# Altium PCB WOLFMAN.PcbDoc (part 1 of 2)
Units mil, origin at the board's own origin, x right, y up, seen from the top; angles counter-clockwise.
Board outline 1610.24 x 1562.99 mil, 4 copper layers (Top Layer, Signal Layer 1, Signal Layer 2, Bottom Layer), stack 30.635 mil thick; 161 components, 149 nets, 706 pads, 227 vias.
Unrouted connection lines stored in the file: 40.
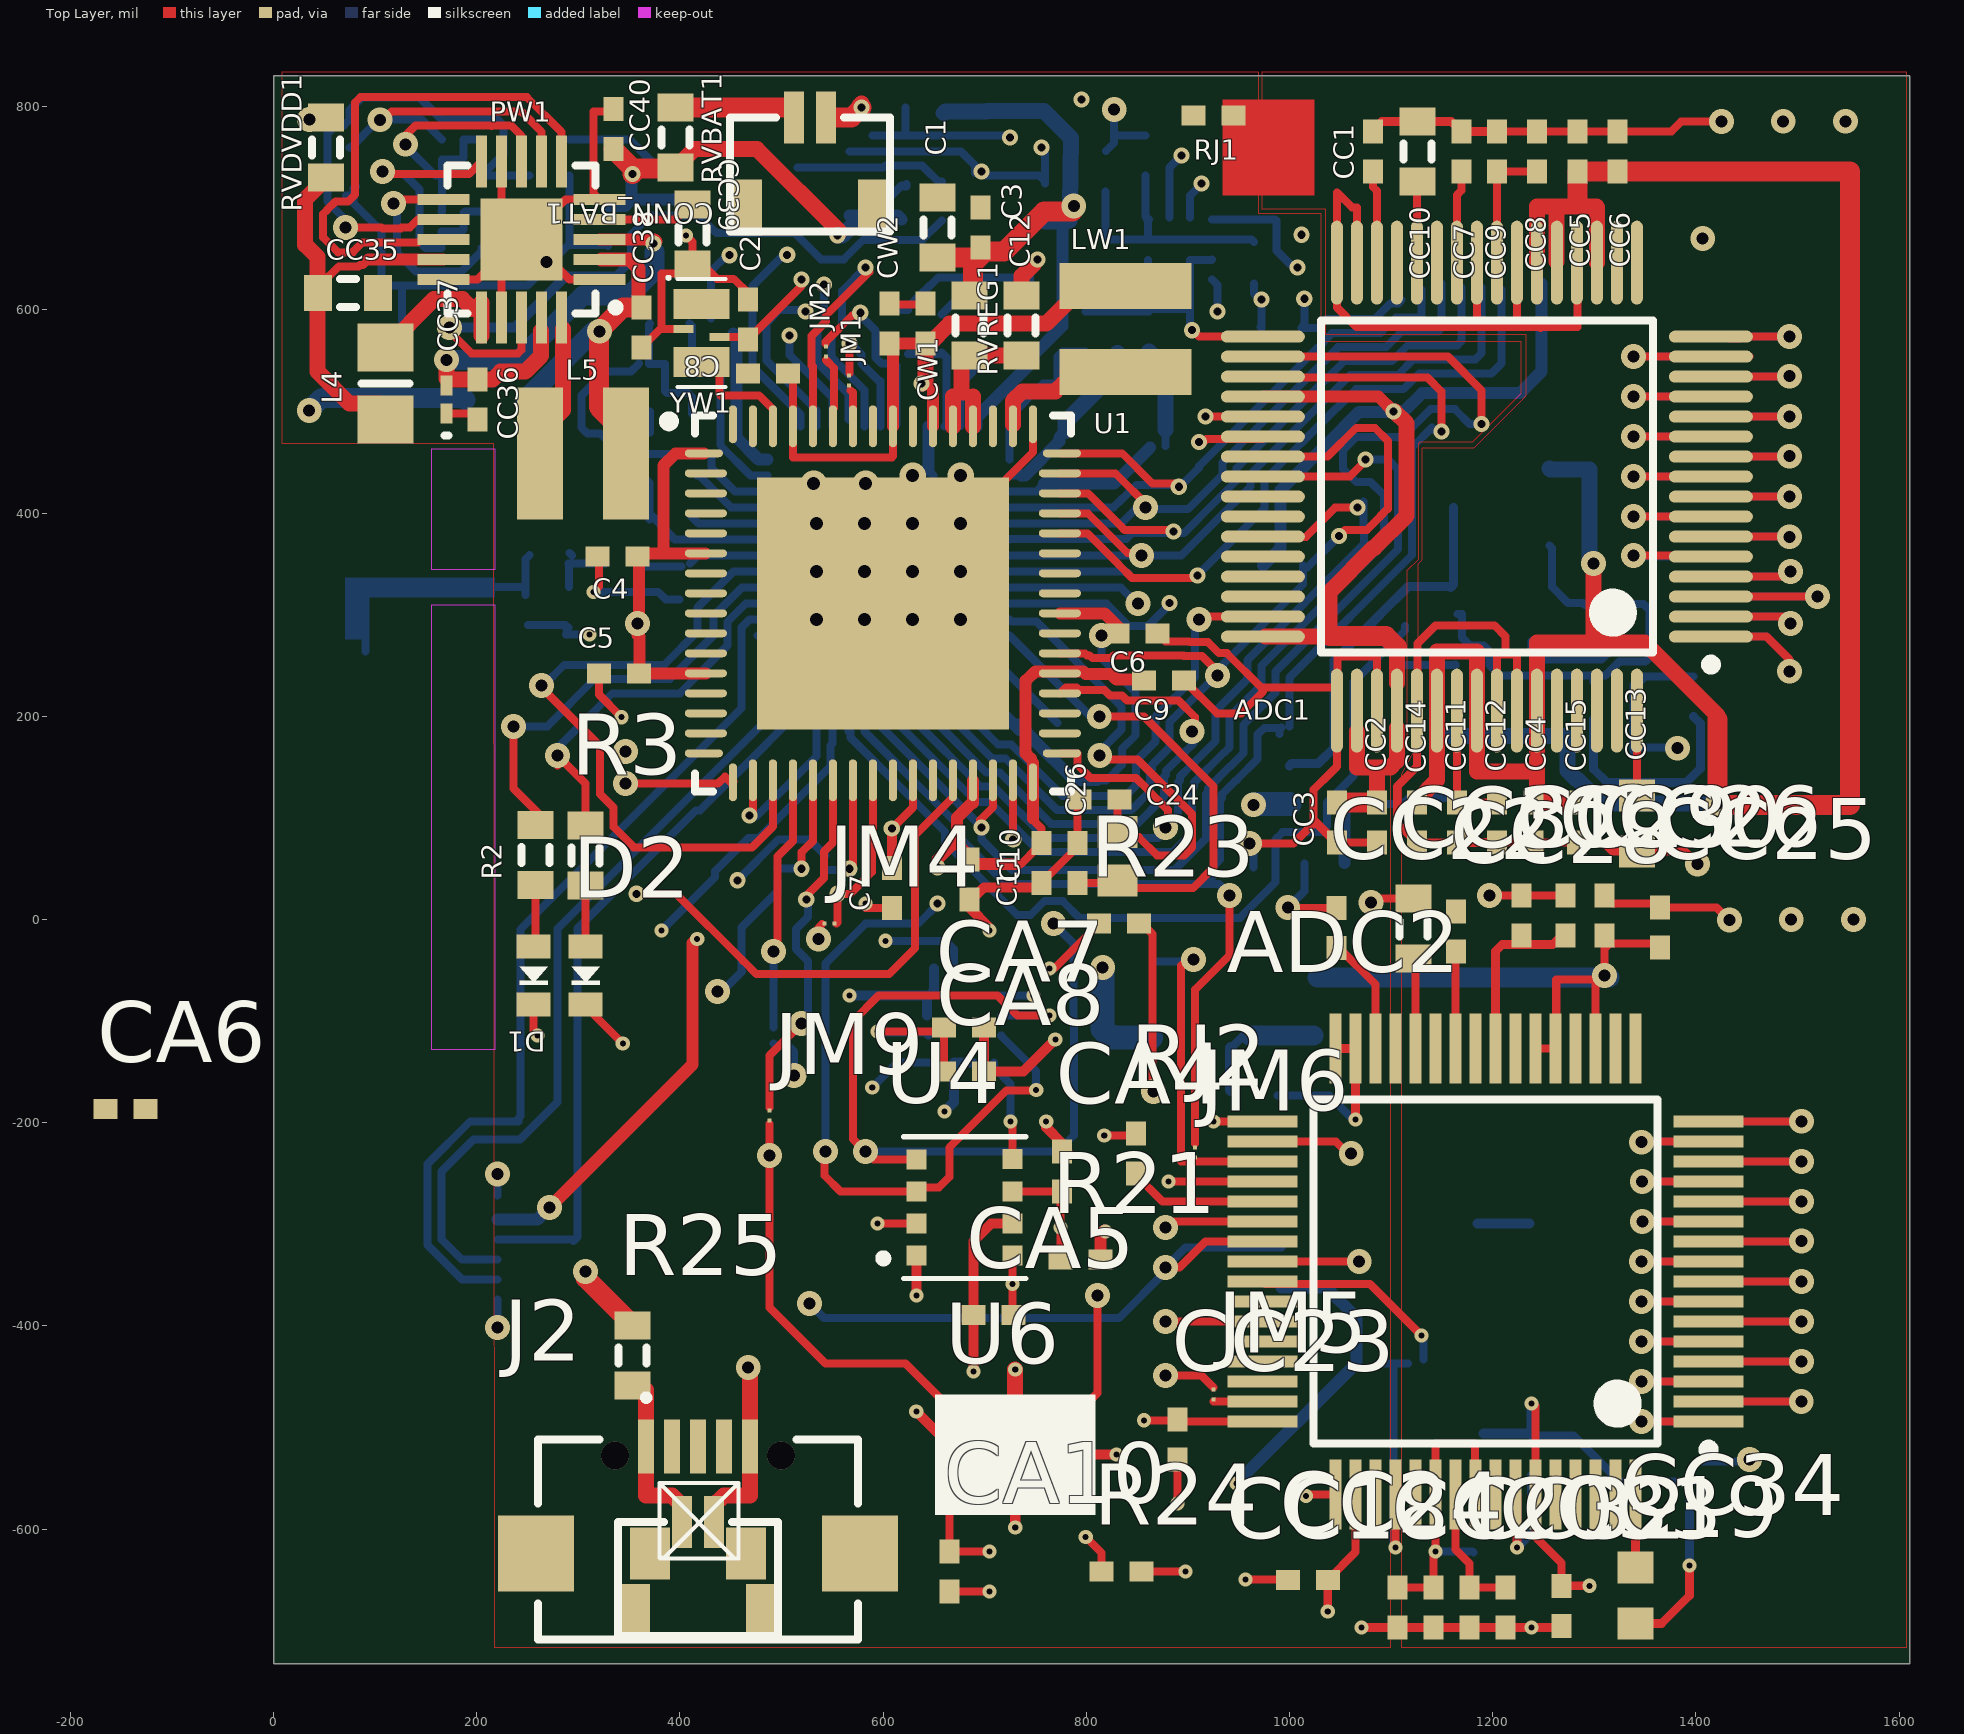
[diagram p0: Top Layer view]
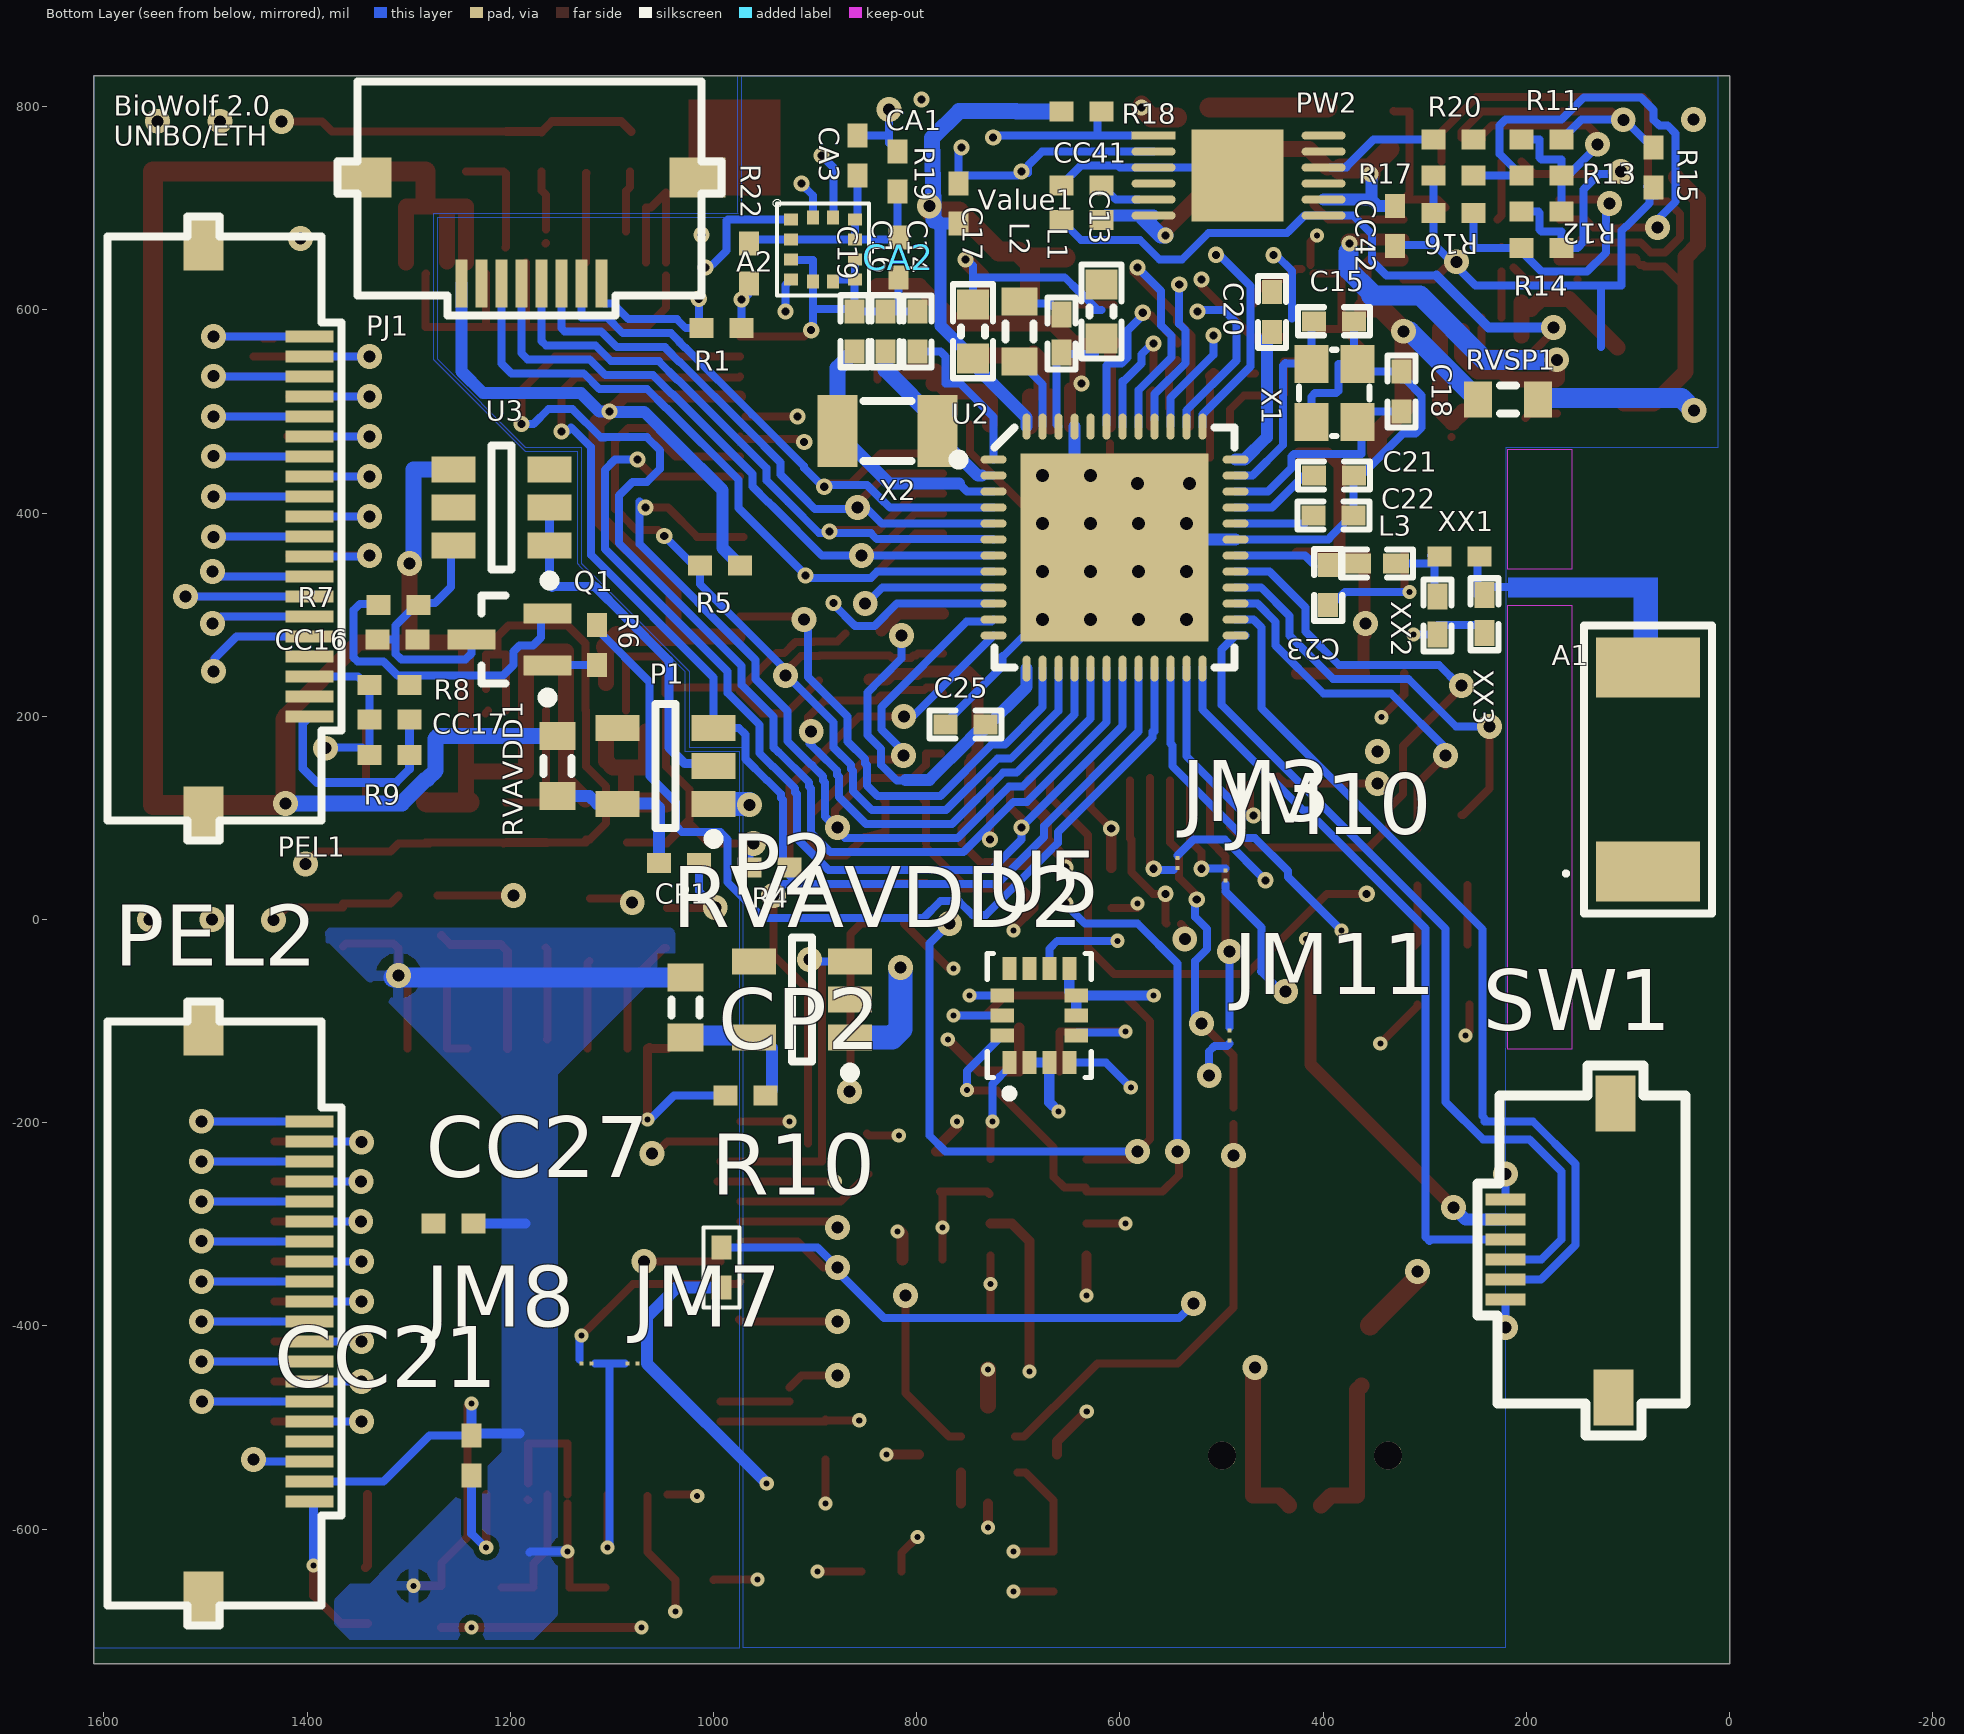
[diagram p1: Bottom Layer view, seen from below]
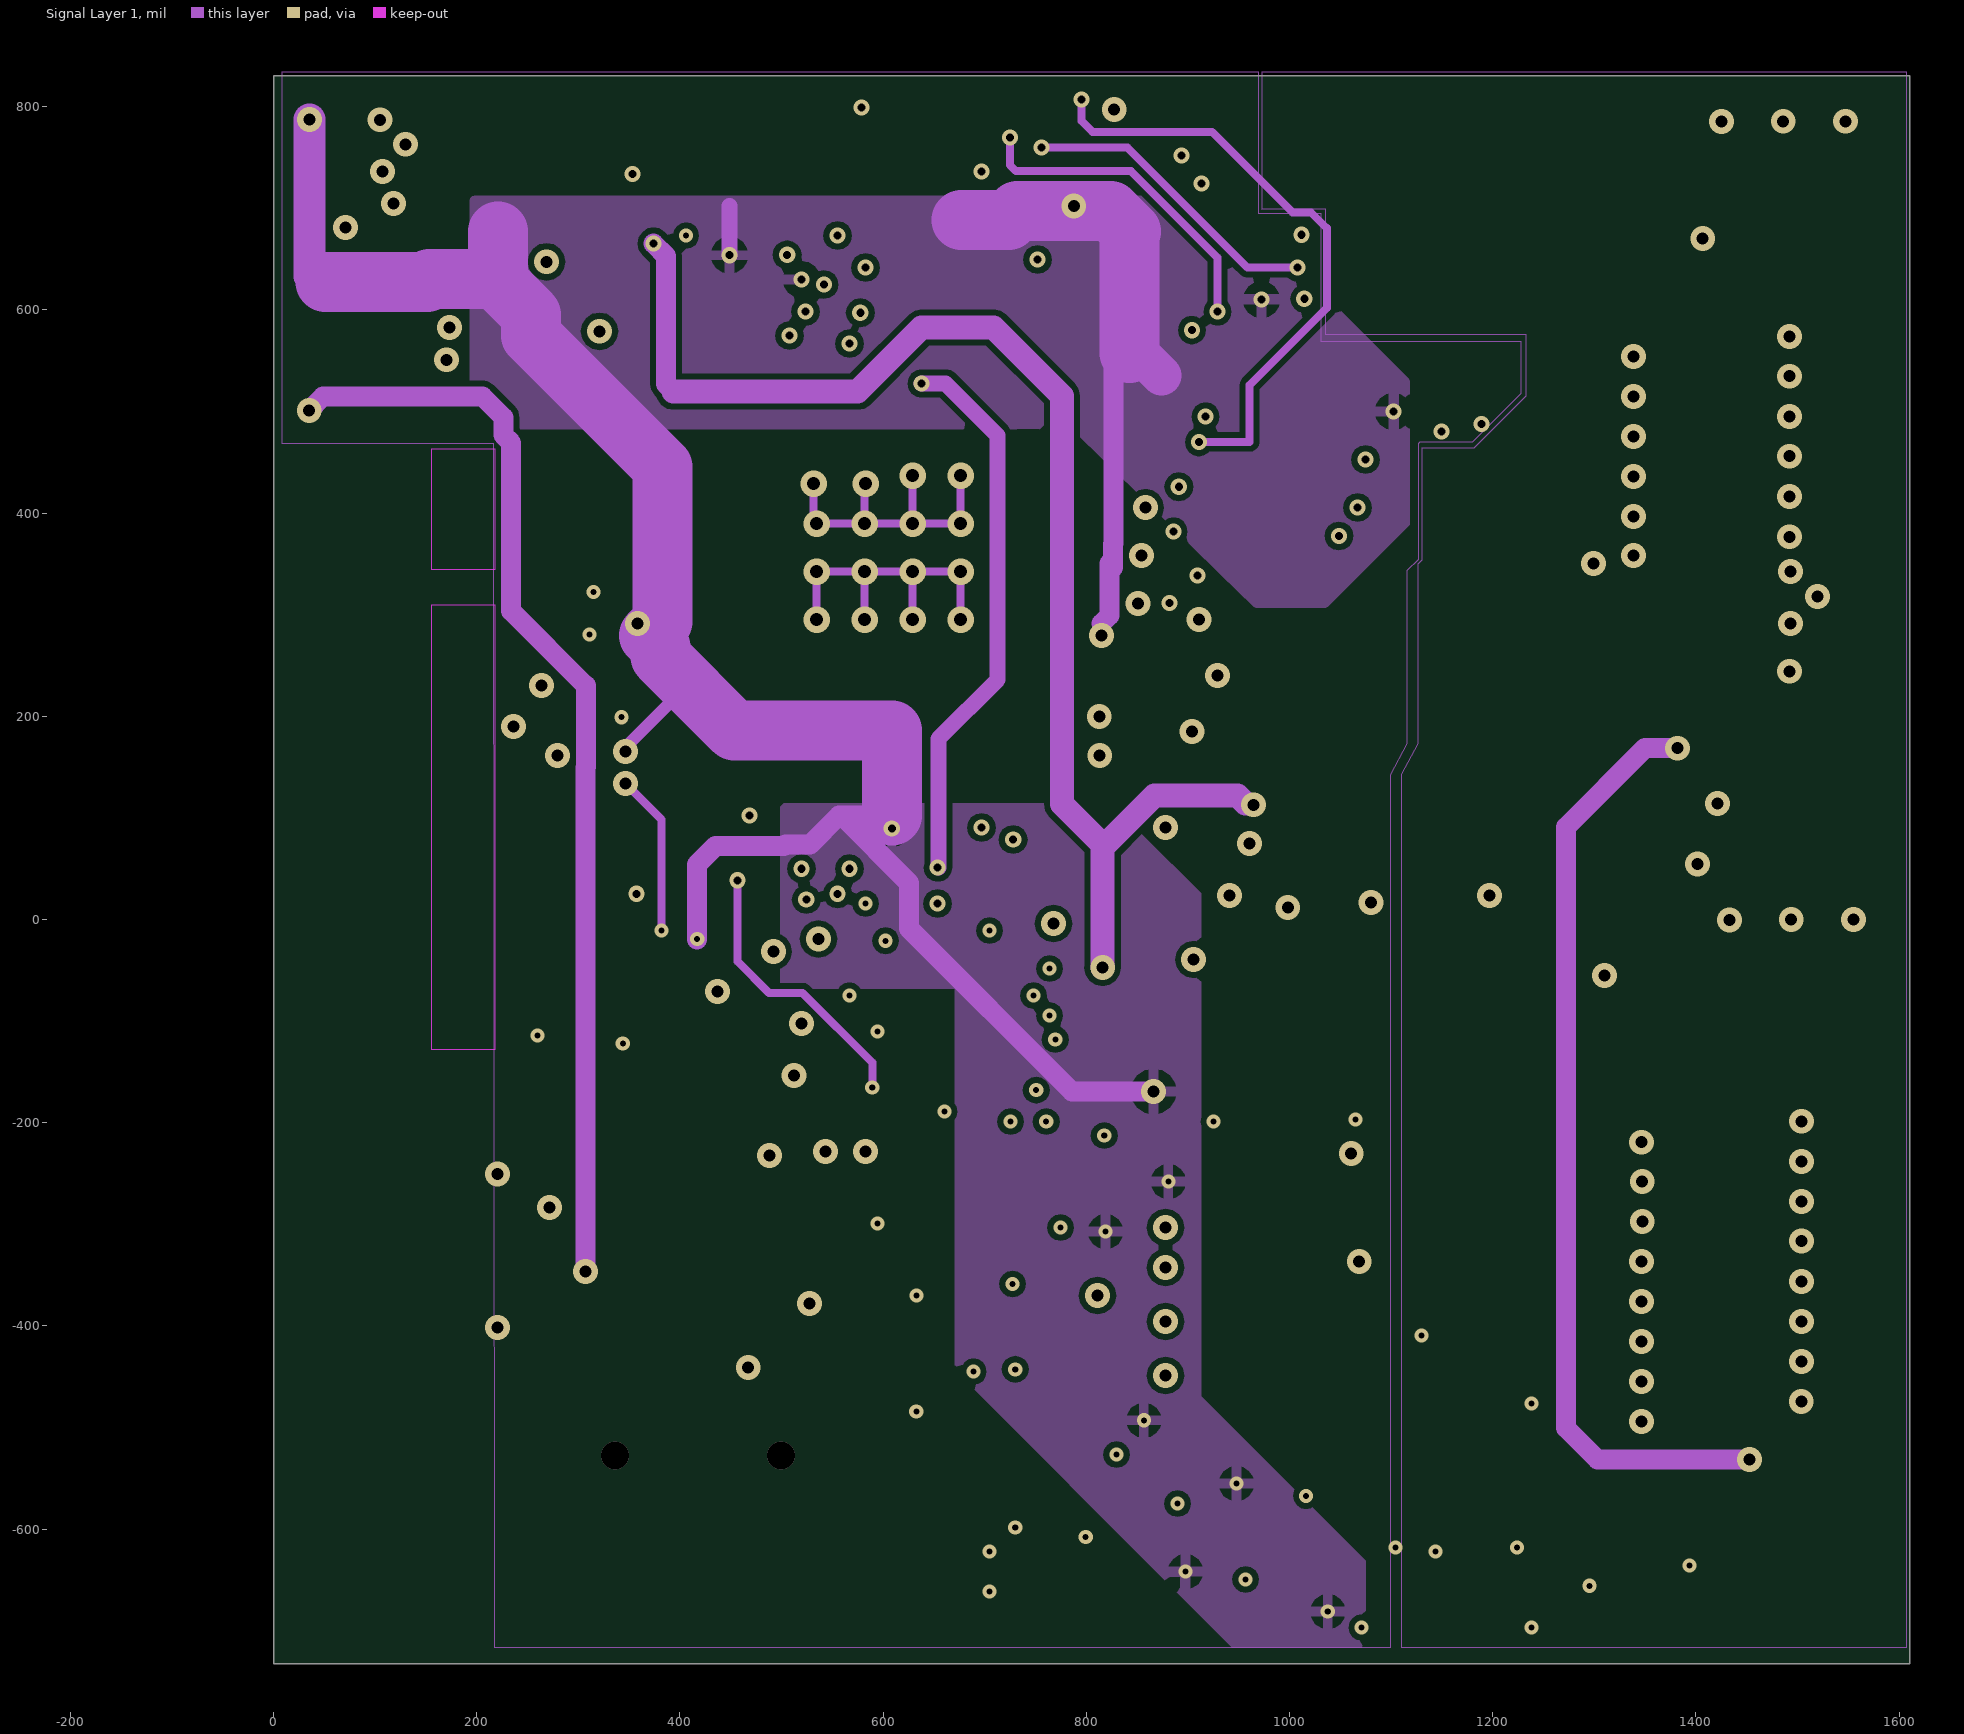
[diagram p2: Signal Layer 1]
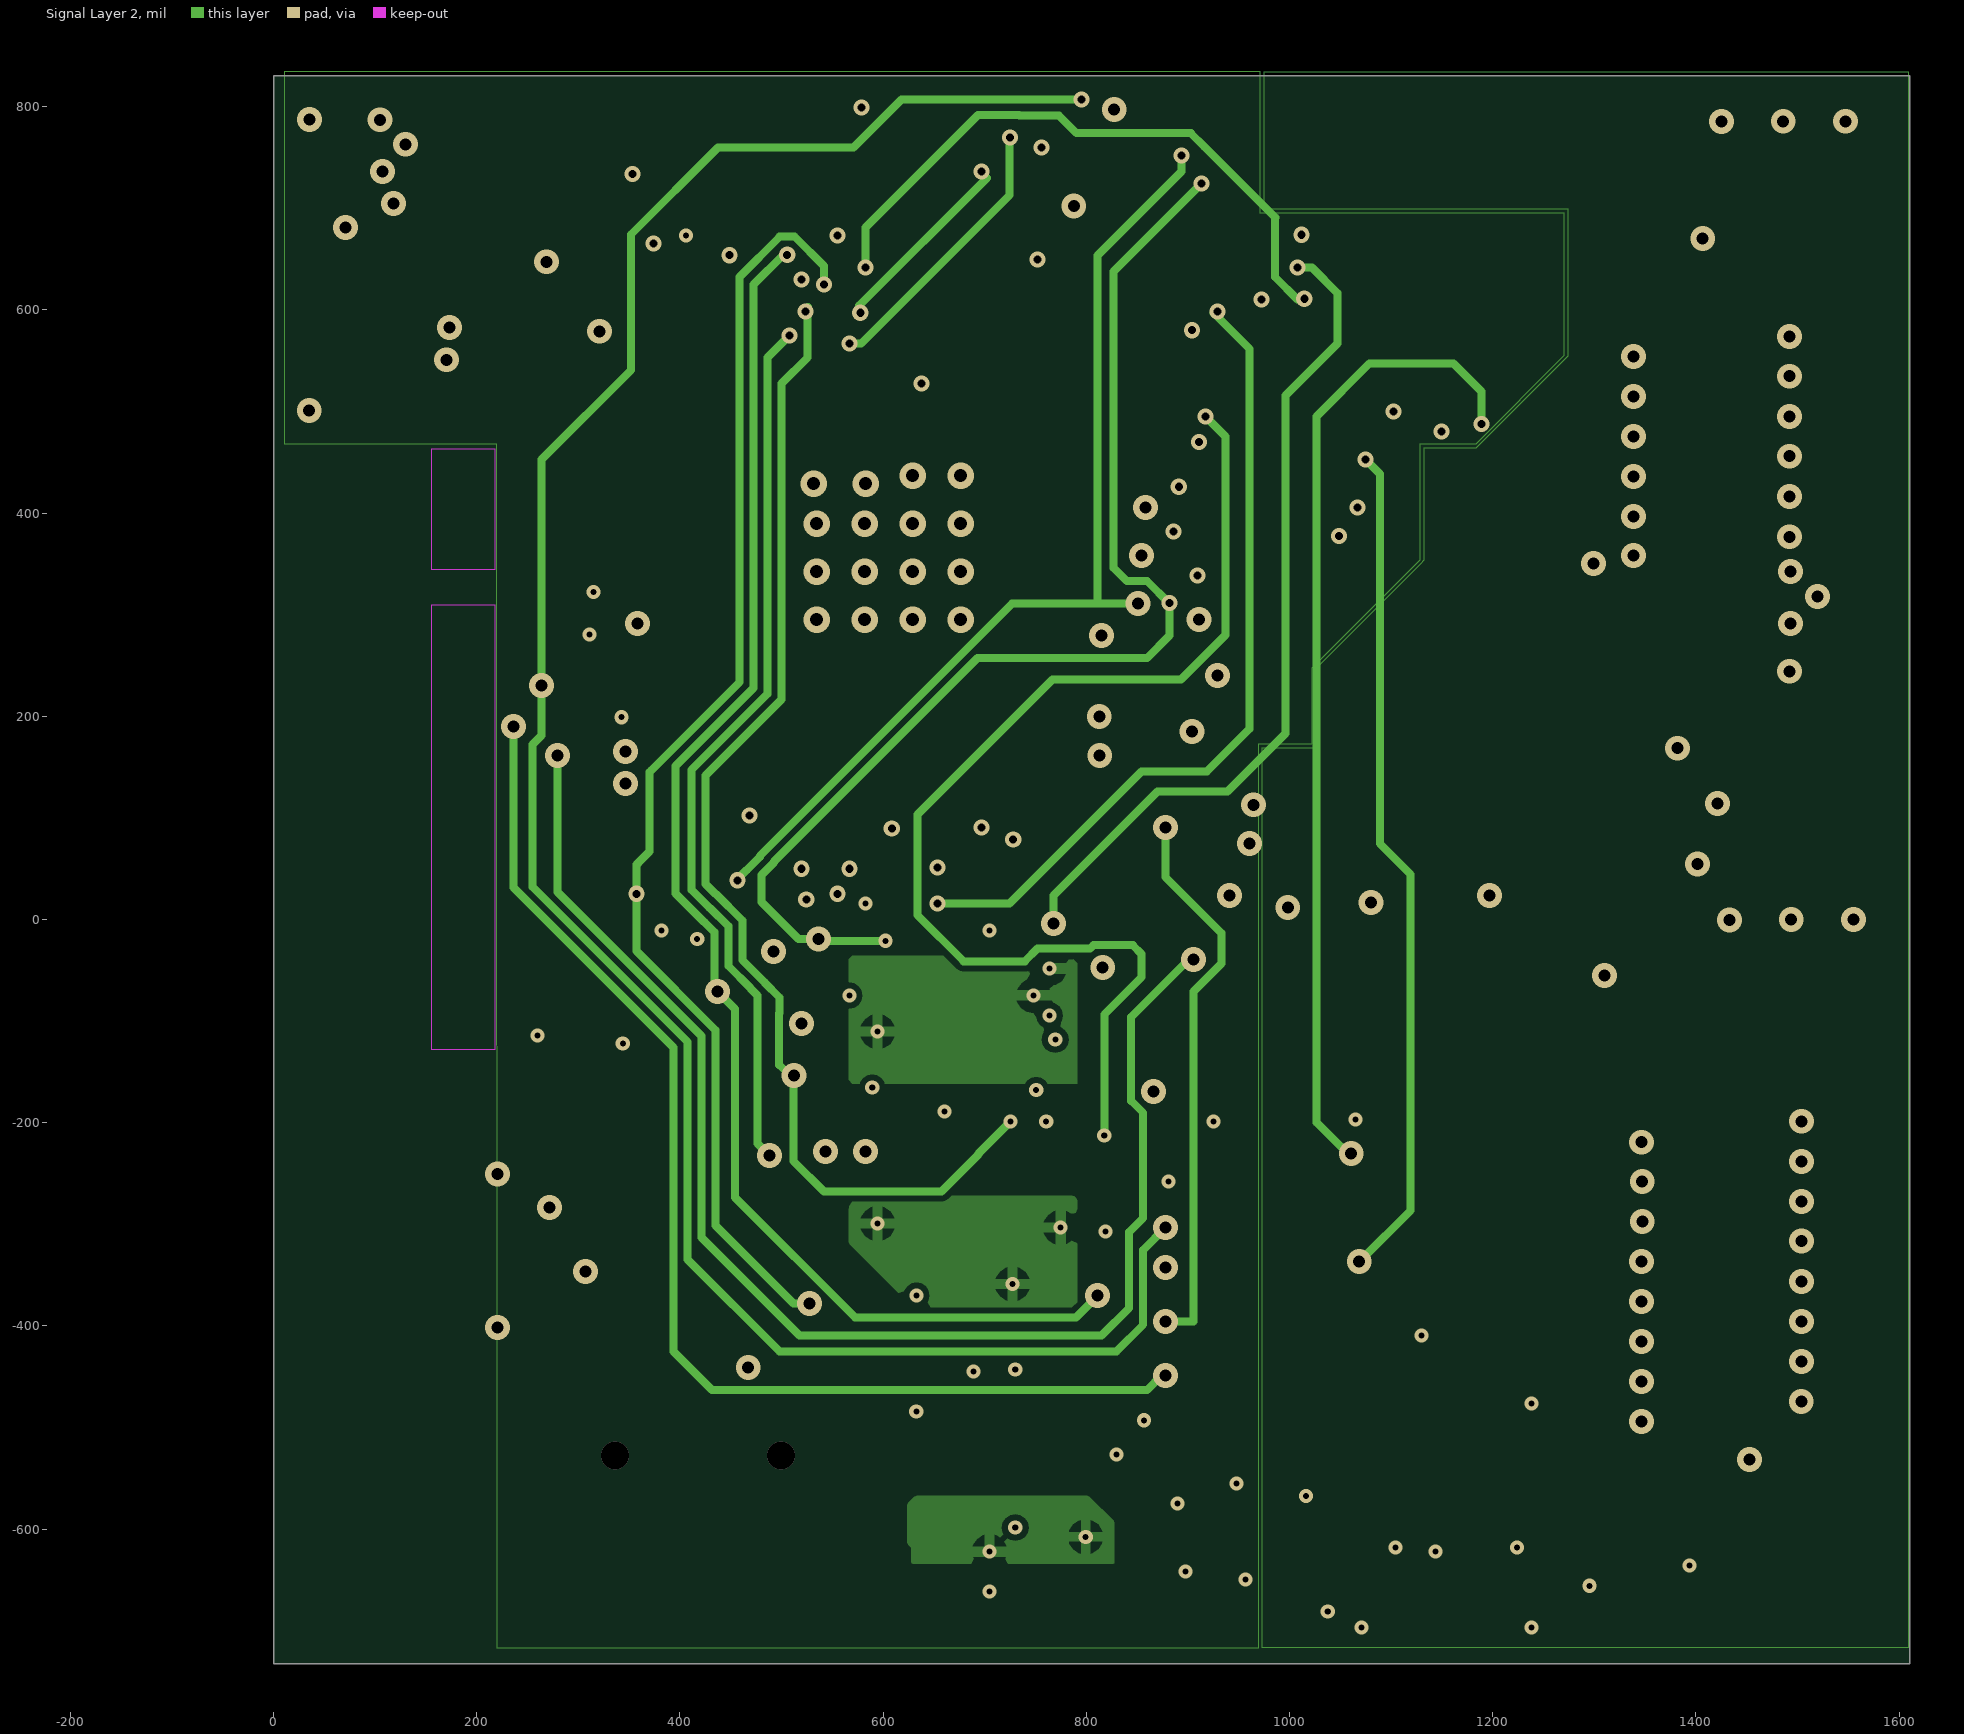
[diagram p3: Signal Layer 2]

## Layer stack, top to bottom
Top Solder: solder mask 0.4, Solder Resist, Dk 3.5
Top Layer: signal copper 1.4
Dielectric 1: core 10, FR-4, Dk 4.2
Signal Layer 1: signal copper 1.4173
Dielectric 3: prepreg 5, Dk 4.2
Signal Layer 2: signal copper 1.4173
Dielectric 2: core 10, Dk 4.2
Bottom Layer: signal copper 1.4
Bottom Solder: solder mask 0.4, Solder Resist, Dk 3.5

## Board outline
0,830.71 0,-732.28 1610.24,-732.28 1610.24,830.71

## Design rules (kind name [scope] priority, off if disabled: settings)
Clearance [All] p1: gap=5.91
PolygonConnect [All] p1: connectstyle=Relief reliefconductorwidth=10 reliefentries=4 polygonreliefangle="90 Angle" airgapwidth=10
RoutingVias [All] p1: holewidth=11.81 width=24.41 viastyle="Through Hole" minholewidth=6 minwidth=14 maxholewidth=11.81 maxwidth=24.41
SolderMaskExpansion [All] p1: expansion=4
UnpouredPolygon [All] p1: allowunpoured=FALSE
Width [All] p1: maxlimit=984.25 minlimit=7.87 preferedwidth=7.87 toplayer_maxwidth=98.43 midlayer1_maxwidth=98.43 midlayer2_maxwidth=98.43 minimp=50.000000 maximp=50.000000 favimp=50.000000
29 further rules are at their usual default settings.

## Classes and differential pairs
component class 03_ANALOG_A: ADC1 CC1 CC2 CC3 CC4 CC5 CC6 CC7 CC8 CC9 CC10 CC11 CC12 CC13 CC14 CC15 CC16 CC17 Q1 R5 R6 R7 R8 R9 RJ1 RJ2 U3
component class 05_POWER: CC35 CC36 CC37 CC38 CC39 CC40 CC41 CC42 CC? CONN_BAT1 CP1 CP2 J2 L4 L5 P1 P2 PW1 PW2 R11 R12 R13 R14 R15 R16 R17 R18 R19 R20 R25 R? RVAVDD1 RVAVDD2 RVBAT1 RVDVDD1 RVSP1 Value1
component class 01_MRWOLF: C1 C2 C3 C4 C5 C6 C7 C8 C9 C10 C11 C12 C27 C28 C29 C30 C32 CW1 CW2 JM1 JM2 JM3 JM4 JM9 JM10 JM11 LW1 PJ1 R1 RVREG1 U1 YW1
component class 02_NRF52832: A1 C13 C14 C15 C16 C17 C18 C19 C20 C21 C22 C23 C24 C25 C26 D1 D2 JM5 JM6 L1 L2 L3 L6 R2 R3 R4 SW1 U2 X1 X2 XX1 XX2 XX3
component class 06_SENSORS: A2 CA1 CA2 CA3 CA4 CA5 CA6 CA7 CA8 CA10 R21 R22 R23 R24 U4 U5 U6
component class 04_ANALOG_B: CC18 CC19 CC20 CC21 CC22 CC23 CC24 CC25 CC26 CC27 CC28 CC29 CC30 CC31 CC32 CC33 CC34 JM7 JM8 PEL2 R10

## Components (designator, comment, footprint, x,y, rotation, side; value= is the part's Value field where it differs from the comment)
A1 "FR05-S1-N-0-102" DFN510P700X220-2N 80.31,146.65 r90 bottom
A2 "IIS2DH" *LGA12R50P4X4_200X200X86 892.12,659.72 r180 bottom
ADC1 "ADS1298IPAG" LQFP64_M 1194.25,426.14 r180 top
ADC2 "ADS1298" "S-PQFP - G64 - ADS1298" 1192.91,-346.46 r180 top
C1 "NC" J1-0603 653.54,681.1 r270 top
C2 "100nF" 0402 467.12,590.55 r270 top
C3 "100nF" 0402 695.89,681.1 r270 top
C4 "100nF" 0402 338.58,357.24 r0 top
C5 "100nF" 0402 339.84,242.4 r0 top
C6 "100nF" 0402 850.39,281.77 r180 top
C7 "100nF" 0402 608.54,31.1 r90 top
C8 "100nF" 0402 486.81,537.4 r0 top
C9 "100nF" 0402 876.41,235.39 r180 top
C10 "100nF" 0402 755.91,55.51 r90 top
C11 "100nF" 0402 685.16,39.37 r90 top
C12 "NC" J1-0603 736.22,584.91 r270 top
C13 "1.0µF" CAPC1608X06L 618.11,598.43 r270 bottom
C14 "100nF" CAPC1005X04L 799.21,578.74 r90 bottom
C15 "12pF" CAPC1005X04L 389.31,588.86 r180 bottom
C16 "12pF" CAPC1005X04L 830.71,579.02 r90 bottom
C17 "4.7µF" CAPC1608X06L 744.69,579.02 r90 bottom
C18 "12pF" CAPC1005X04L 322.83,519.68 r90 bottom
C19 "12pF" CAPC1005X04L 861.43,579.02 r90 bottom
C20 "100nF" CAPC1005X04L 450.47,598.11 r90 bottom
C21 "100pF" CAPC1005X04L 389.31,437.01 r180 bottom
C22 "N.C." CAPC1005X04L 389.76,397.64 r0 bottom
C23 "0.8pF" CAPC1005X04L 394.99,329.34 r90 bottom
C24 "12pF" 0402 813.15,118.11 r0 top
C25 "100nF" CAPC1005X04L 751.97,191.81 r0 bottom
C26 "12pF" 0402 791.11,55.51 r270 top
CA1 "100nF" 0402 818.9,736.22 r270 bottom
CA2 "10uF" 0402 818.18,651.83 r90 bottom
CA3 "100nF" 0402 858.27,751.97 r270 bottom
CA4 "100nF" 0402 776.06,-248.03 r270 top
CA5 "100nF" 0402 708.66,-389.04 r0 top
CA6 "100nF" 0402 -145.67,-186.66 r180 top
CA7 "10uF" 0402 679.41,-106.3 r180 top
CA8 "100nF" 0402 679.41,-149.61 r180 top
CA10 "100nF" 0402 665.35,-641.73 r90 top
CC1 "Cap Semi" 0402 1082.28,755.91 r270 top
CC2 "100nF" 0402 1085.98,95.51 r90 top
CC3 "1uF" 0402 1046.61,95.51 r90 top
CC4 "Cap Semi" 0402 1240.16,95.51 r90 top
CC5 "Cap Semi" 0402 1283.46,755.91 r270 top
CC6 "Cap Semi" 0402 1322.83,755.91 r270 top
CC7 "Cap Semi" 0402 1169.29,755.91 r270 top
CC8 "Cap Semi" 0402 1243.46,755.91 r270 top
CC9 "Cap Semi" 0402 1204.09,755.91 r270 top
CC10 "Cap Semi" J1-0603 1125.98,755.91 r270 top
CC11 "Cap Semi" 0402 1164.72,95.51 r90 top
CC12 "Cap Semi" 0402 1204.09,95.51 r90 top
CC13 "Cap Semi" 1608[0603] 1341.89,94.49 r90 top
CC14 "100nF" 0402 1125.35,95.51 r90 top
CC15 "10uF" 0402 1282.83,95.51 r90 top
CC16 "100nF" 0402 1311.02,275.51 r0 bottom
CC17 "100nF" 0402 1318.9,196.84 r0 bottom
CC18 "Cap Semi" 0402 1141.73,-677.17 r90 top
CC19 "Cap Semi" 0402 1267.72,-675.44 r90 top
CC20 "Cap Semi" 0402 1106.3,-677.17 r90 top
CC21 "Cap Semi" 0402 1238.19,-527.56 r90 bottom
CC22 "Cap Semi" 0402 1046.02,-8.11 r270 top
CC23 "100nF" 0402 889.76,-511.81 r90 top
CC24 "1uF" 0402 1017.95,-649.85 r0 top
CC25 "Cap Semi" 0402 1364.83,-7.87 r270 top
CC26 "Cap Semi" 0402 1310.08,3.94 r270 top
CC27 "Cap Semi" 0402 1255.84,-299.21 r180 bottom
CC28 "Cap Semi" 0402 1163.7,-11.81 r270 top
CC29 "Cap Semi" 0402 1228.35,3.94 r270 top
CC30 "Cap Semi" 0402 1271.65,3.94 r270 top
CC31 "Cap Semi" J1-0603 1121.86,-8.83 r270 top
CC32 "Cap Semi" 0402 1177.17,-677.17 r90 top
CC33 "Cap Semi" 0402 1212.6,-677.17 r90 top
CC34 "Cap Semi" 1608[0603] 1340.55,-665.35 r90 top
CC35 "22uF" J1-0603 73.23,616.53 r180 top
CC36 "4.7uF" 0402 200.79,511.81 r90 top
CC37 "100nF" 0603 170.08,511.81 r90 top
CC38 "4.7uF" 0402 362.2,582.68 r90 top
CC39 "10nF" J1-0603 412.4,674.08 r90 top
CC40 "10uF" 0402 334.65,777.95 r270 top
CC41 "0.47UF" 0402 637.8,722.65 r180 bottom
CC42 "1UF" 0402 329.29,682.75 r90 bottom
CONN_BAT1 "DF52-2S-0.8H(21)" DF52-2S-0.8H(21) 527.95,720.47 r0 top
CP1 "1uF" 0402 1034.25,55.51 r0 bottom
CP2 "1uF" 0402 968.5,-173.23 r180 bottom
CW1 "4.7uF" 0402 641.73,586.61 r270 top
CW2 "100nF" 0402 606.3,586.61 r270 top
D1 "LED Red" DIOC1608X08L 255.91,-55.12 r270 top
D2 "LED Orange" DIOC1608X08L 307.09,-55.12 r270 top
J2 "USBCONNCOMBO" "MICRO-USB(2.0-SMT-TYPE-B) Combo" 417.72,-708.66 r0 top
JM1 "uJumper" UJMPR#1 -665.93,1295.28 r180 top
JM2 "uJumper" UJMPR#1 -688.58,1324.09 r180 top
JM3 "uJumper" UJMPR#2 543.31,55.51 r0 bottom
JM4 "uJumper" UJMPR#2 547.24,-3.94 r270 top
JM5 "uJumper" UJMPR#1 2157.48,-1232.28 r0 top
JM6 "uJumper" UJMPR#1 2139.4,-994.09 r0 top
JM7 "uJumper" UJMPR#1 314.96,795.28 r90 bottom
JM8 "uJumper" UJMPR#1 360.24,795.28 r90 bottom
JM9 "uJumper" UJMPR#2 488.19,-192.91 r0 top
JM10 "uJumper" UJMPR#2 496.06,43.31 r180 bottom
JM11 "uJumper" UJMPR#2 492.13,-114.17 r180 bottom
L1 "LQW15AN15NJ00D" INDC1005X04L 657.69,576.96 r90 bottom
L2 "L0603B100KDWFT" J1-0603 698.81,579.02 r270 bottom
L3 "3.9nH" INDC1005X04L 346.85,350.28 r180 bottom
L4 "MLZ2012N100L" 6-0805_N 110.24,527.56 r270 top
L5 "LQH3NPZ220MJRL" 1212_PCK 325.2,797.52 r180 top
LW1 "SRN4026-220M" 1212_PCK 500,601.85 r270 top
P1 "ADP122AUJZ_2p7" UJ-5_N 1047.24,151.24 r0 bottom
P2 "ADP122AUJZ_2p7" UJ-5_N 913.07,-78.74 r0 bottom
PEL1 "MOLEX_5051102091" MOLEX_5051102091 1399.61,386.77 r90 bottom
PEL2 "MOLEX_5051102091" MOLEX_5051102091 1399.61,-385.83 r90 bottom
PJ1 "MOLEX_5051100892" MOLEX_5051100892 1179.13,683.35 r180 bottom
PW1 "BQ25570RGRT" VQFN20 244.09,669.29 r90 top
PW2 "BQ27441-G1" DRZ12_SMALL 586.61,771.65 r180 bottom
Q1 "PMSS3906" SOT323_N 1200.79,275.59 r0 bottom
R1 "NC" 0402 992.13,582.05 r180 bottom
R2 "" J1-0603 257.87,63.7 r90 top
R3 "" J1-0603 307.09,62.99 r90 top
R4 "100K" 0402 944.88,51.18 r0 bottom
R5 "NC" 0402 993.7,348.44 r180 bottom
R6 "4.7K" 0402 1114.97,270.01 r270 bottom
R7 "4.7K" 0402 1310.23,309.54 r0 bottom
R8 "4.7K" 0402 1318.9,230.89 r0 bottom
R9 "22K" 0402 1318.9,162.13 r0 bottom
R10 "NC" 0402 992.13,-342.52 r270 bottom
R11 "7M32" 0402 185.04,767.72 r180 bottom
R12 "1M24" 0402 185.04,696.85 r0 bottom
R13 "4M22" 0402 185.26,732.28 r0 bottom
R14 "6M65" 0402 185.04,661.1 r0 bottom
R15 "5M6" 0402 74.8,740.16 r270 bottom
R16 "4M99" 0402 271.65,695.63 r0 bottom
R17 "8M66" 0402 271.65,732.28 r0 bottom
R18 "1M" 0402 637.8,795.28 r180 bottom
R19 "1M" 0402 759.08,704.72 r90 bottom
R20 "10K" 0402 271.65,767.72 r180 bottom
R21 "Res3" 0402 794.3,-334.47 r180 top
R22 "Res3" 0402 964.9,645.67 r90 bottom
R23 "Res3" 0402 832.28,-3.94 r180 top
R24 "Res3" 0402 834.65,-641.73 r180 top
R25 "Res3" J1-0603 353.29,-429.13 r90 top
RJ1 "0R" 0402 925.2,791.34 r0 top
RJ2 "0R" 0402 848.97,-230.31 r270 top
RVAVDD1 "1" J1-0603 1153.54,150.91 r90 bottom
RVAVDD2 "1" J1-0603 1027.7,-86.61 r90 bottom
RVBAT1 "1" J1-0603 395.81,769.69 r270 top
RVDVDD1 "1" J1-0603 51.63,759.84 r90 top
RVREG1 "" J1-0603 685.04,584.91 r90 top
RVSP1 "1" J1-0603 218.11,511.81 r0 bottom
SW1 "MOLEX_5051100692" MOLEX_5051100692 110.24,-403.54 r270 bottom
U1 "Mr. Wolf PULP" QFN50P900X900X100_HS_NOVIAS_65M 599.72,311.3 r0 top
U2 "nRF52832-QFAA" QFN40P600X600X90-48N 605.32,366.14 r180 bottom
U3 "LT1790-2p048" SOT-23_A_N 1208.66,405.51 r0 bottom
U4 "BME680" *PSON80P300X300X100-8N 680.12,-283.46 r180 top
U5 "LSM6DSRX" *PQFN50P300X250X86-14N 679.41,-94.49 r90 bottom
U6 "MP34DT05-A" MIC-PACK_MP34DT05-A(Primary) 729.98,-526.57 r270 top
Value1 "0.01" 0402 637.8,688.69 r0 bottom (schematic designator =Value1)
X1 "FA-128 32.0000MF10Z-AJ3-ND" BT-XTAL_2016 389.06,518.32 r90 bottom
X2 "ABS07AIG-32.768kHz-9-1-T" XTAL_3215 828.58,480.64 r0 bottom
XX1 "0" 0402 265.75,357.58 r180 bottom
XX2 "NC" INDC1005X04L 287.4,299.21 r270 bottom
XX3 "NC" INDC1005X04L 241.02,300.51 r270 bottom
YW1 "SIT1533AC-H5-DCC-32.768E" SiT1533-C 421.26,577.57 r270 top

## Footprints (in the part's own frame and the unit in brackets; to place one, negate y for a bottom-side part, rotate by r counter-clockwise, add the part's x,y. Pads: shape width x height; smd on the part's side, far side on the other; paste and mask are expansions set on the pad)
6-0805_N [mm] "Chip Resistor, Body 2.0x1.2mm, IPC Medium Density"
  rect 1.2x1.4 smd: 1(-0.9,0) 2(0.9,0)
  silkscreen extent 0,-0.6 0,0.6, body extent -1.07,-0.7 1.07,0.7, height 0.7
0402 [mm] "Chip Capacitor, Body 1.0x0.5mm, IPC High Density"
  rect 0.6x0.5 smd: 1(-0.5,0) 2(0.5,0)
  body extent -0.55,-0.3 0.55,0.3, height 1.3
0603 [mm] "Chip Inductor, Body 0.6x0.3mm, IPC High Density"
  rect 0.5x0.3 smd: 1(-0.35,0) 2(0.35,0)
  silkscreen extent -0.9,-0.05 -0.9,0.05, body extent -0.33,-0.18 0.33,0.18, height 0.55
1212_PCK [mm]
  rect 1.15x3.3 smd: 1(-0.55,8.6) 2(1.6,8.6)
1608[0603] [mm] "Chip Capacitor, Body 1.6x0.8mm, IPC High Density"
  rect 0.8x0.9 smd: 1(-0.7,0) 2(0.7,0)
  body extent -0.87,-0.48 0.87,0.48, height 1.3
*LGA12R50P4X4_200X200X86 [mm]
  rect 0.35x0.3 smd: 1(-0.8,0.75) 2(-0.8,0.25) 3(-0.8,-0.25) 4(-0.8,-0.75) 7(0.8,-0.75) 8(0.8,-0.25) 9(0.8,0.25) 10(0.8,0.75)
  rect 0.3x0.35 smd: 5(-0.25,-0.8) 6(0.25,-0.8) 11(0.25,0.8) 12(-0.25,0.8)
  silkscreen extent -1.25,-1.15 1.15,1.25
*PQFN50P300X250X86-14N [mm]
  rect 0.58x0.35 smd: 1(-1.175,0.75) 2(-1.175,0.25) 3(-1.175,-0.25) 4(-1.175,-0.75) 8(1.175,-0.75) 9(1.175,-0.25) 10(1.175,0.25) 11(1.175,0.75)
  rect 0.35x0.58 smd: 5(-0.5,-0.925) 6(0,-0.925) 7(0.5,-0.925) 12(0.5,0.925) 13(0,0.925) 14(-0.5,0.925)
  silkscreen extent -2.05,-1.3 1.55,1.3
*PSON80P300X300X100-8N [mm]
  rect 0.5x0.5 smd: 1(1.2,1.2) 2(1.2,0.4) 3(1.2,-0.4) 4(1.2,-1.2) 5(-1.2,-1.22) 6(-1.2,-0.4) 7(-1.2,0.4) 8(-1.2,1.2)
  silkscreen extent -1.53,-1.77 2.13,1.77
BT-XTAL_2016 [mm]
  rect 0.95x0.85 smd: 1(-0.725,-0.575) 2(0.725,-0.575) 3(0.725,0.575) 4(-0.725,0.575)
  silkscreen extent -1.08,-0.88 1.08,0.88, body extent -1.05,-0.85 1.05,0.85, height 0.56
CAPC1005X04L [mm]
  rect 0.6x0.5 smd: 1(-0.5,0) 2(0.5,0)
  silkscreen extent -0.9,-0.35 0.9,0.35, body extent -0.51,-0.25 0.51,0.25, height 0.5
CAPC1608X06L [mm]
  rect 0.75x0.8 smd: 1(-0.675,0) 2(0.675,0)
  silkscreen extent -1.17,-0.5 1.17,0.5, body extent -0.8,-0.43 0.8,0.43, height 0.8
DF52-2S-0.8H(21) [mm]
  rect 0.8x1.4 smd: 0(-1.6,-0.5) 0(1.6,-0.5)
  rect 0.5x1.3 smd: 1(-0.4,1.75) 2(0.4,1.75)
  silkscreen extent -2,-1.1 2,1.75, body extent -1.9,-1.05 1.9,1.72, height 1.66
DFN510P700X220-2N [mm]
  rect 1.5x2.6 smd: 1(2.575,0) 2(-2.525,0)
  Top Layer region: 3.277,0.25 4.827,0.25 4.827,-0.25 3.277,-0.25
  Top Layer region: 4.327,3.5 4.827,3.5 4.827,-0.225 4.327,-0.225
  Keep-Out Layer region: -6.973,3.5 4.127,3.5 4.127,1.9 -6.973,1.9
  Keep-Out Layer region: 5.027,3.5 8.027,3.5 8.027,1.9 5.027,1.9
  silkscreen extent -3.57,-1.6 3.62,2.1, body extent -3.58,-1.6 3.62,1.6, height 2.2
DIOC1608X08L [mm] "Chip Diode, 2-Leads, Body 1.60x0.80mm, IPC High Density"
  rect 0.6x0.85 smd: 1(-0.725,0) 2(0.725,0)
  silkscreen extent -0.23,-0.35 0.23,0.35, body extent -0.8,-0.4 0.81,0.4, height 0.72
DRZ12_SMALL [mm]
  rect 2.3x2.3 smd: 0(2.6,-1)
  rect 1.1x0.2 smd: 1(0.5,0)
  oval 1.1x0.2 smd: 2(0.5,-0.4) 3(0.5,-0.8) 4(0.5,-1.2) 5(0.5,-1.6) 6(0.5,-2) 7(4.75,-2) 8(4.75,-1.6) 9(4.75,-1.2) 10(4.75,-0.8) 11(4.75,-0.4) 12(4.75,0)
INDC1005X04L [mm]
  rect 0.65x0.5 smd: 1(-0.475,0) 2(0.475,0)
  silkscreen extent -0.9,-0.35 0.9,0.35, body extent -0.5,-0.3 0.5,0.3, height 0.5
J1-0603 [mm] "Chip Resistor, Body 1.6x0.8mm, IPC High Density"
  rect 0.7x0.9 smd: 1(-0.75,0) 2(0.75,0)
  silkscreen extent -0.2,-0.35 0.2,0.35, body extent -0.85,-0.48 0.85,0.48, height 0.9
LQFP64_M [mm] "Thin QFP, 64-Leads, Body 10x10mm, Pitch 0.5mm, IPC Low Density"
  oval 2.1x0.3 smd: 1(-5.6,3.75) 2(-5.6,3.25) 3(-5.6,2.75) 4(-5.6,2.25) 5(-5.6,1.75) 6(-5.6,1.25) 7(-5.6,0.75) 8(-5.6,0.25) 9(-5.6,-0.25) 10(-5.6,-0.75) 11(-5.6,-1.25) 12(-5.6,-1.75) 13(-5.6,-2.25) 14(-5.6,-2.75) 15(-5.6,-3.25) 16(-5.6,-3.75) 33(5.6,-3.75) 34(5.6,-3.25) 35(5.6,-2.75) 36(5.6,-2.25) 37(5.6,-1.75) 38(5.6,-1.25) 39(5.6,-0.75) 40(5.6,-0.25) 41(5.6,0.25) 42(5.6,0.75) 43(5.6,1.25) 44(5.6,1.75) 45(5.6,2.25) 46(5.6,2.75) 47(5.6,3.25) 48(5.6,3.75)
  oval 0.3x2.1 smd: 17(-3.75,-5.6) 18(-3.25,-5.6) 19(-2.75,-5.6) 20(-2.25,-5.6) 21(-1.75,-5.6) 22(-1.25,-5.6) 23(-0.75,-5.6) 24(-0.25,-5.6) 25(0.25,-5.6) 26(0.75,-5.6) 27(1.25,-5.6) 28(1.75,-5.6) 29(2.25,-5.6) 30(2.75,-5.6) 31(3.25,-5.6) 32(3.75,-5.6) 49(3.75,5.6) 50(3.25,5.6) 51(2.75,5.6) 52(2.25,5.6) 53(1.75,5.6) 54(1.25,5.6) 55(0.75,5.6) 56(0.25,5.6) 57(-0.25,5.6) 58(-0.75,5.6) 59(-1.25,5.6) 60(-1.75,5.6) 61(-2.25,5.6) 62(-2.75,5.6) 63(-3.25,5.6) 64(-3.75,5.6)
  silkscreen extent -5.72,-4.15 4.15,4.57, body extent -5,-5 5,5, height 1.6
MIC-PACK_MP34DT05-A(Primary) [mm]
  rect 0.4x0.95 smd: CLK(-0.45,0.675) DOUT(-0.45,-0.675) LR(0.45,0.675) VDD(0.45,-0.675)
  rect 0.35x2.3 smd: GND(-1.225,0) GND1(1.225,0)
  rect 1.3x0.35 smd: GND2(0,1.725) GND3(0,-1.725)
  silkscreen extent -1.5,-2 1.5,2
"MICRO-USB(2.0-SMT-TYPE-B) Combo" [mm]
  rect 0.4x1.35 smd: 1(-1.3,4.825) 2(-0.65,4.825) 3(0,4.825) 4(0.65,4.825) 5(1.3,4.825)
  rect 0.5x1.3 smd: 1(-0.4,2.944) 5(0.4,2.944)
  rect 1.9x1.9 smd: 6(-4.05,2.15) 9(4.05,2.15)
  rect 1x1.3 smd: 7(-1.2,2.15) 8(1.2,2.15)
  round 0.7 hole 0.7: 10(-2.075,4.6) 11(2.075,4.6)
  rect 0.8x1.4 smd: ""(-1.6,0.694) ""(1.6,0.694)
  Top Layer lines w0.4: -1.3,4.825 -1.3,3.607 -0.654,3.607 -0.4,3.353 ; 0.4,3.353 0.654,3.607 1.3,3.607 1.3,4.825
  silkscreen extent -4,0 4,6.1
MOLEX_5051100692 [mm] "FFC & FPC Connectors 0.5 FPC ZIF BTM CONT EMBT PKG 6Ckt"
  rect 1.4x1 smd: 0(-5.65,-0.05) 0(1.7,-0.1)
  rect 0.3x1 smd: 1(-3.25,-2.8) 2(-2.75,-2.8) 3(-2.25,-2.8) 4(-1.75,-2.8) 5(-1.25,-2.8) 6(-0.75,-2.8)
  silkscreen extent -6.6,-3.5 2.65,1.7, body extent -6.25,-3 2.25,2.3, height 1.88
MOLEX_5051100892 [mm] "CONN FCC 8 poles, 0.5mm"
  rect 1.4x1 smd: 0(-4.2,1.2) 0(4.15,1.2)
  rect 0.3x1.2 smd: 1(-1.75,-1.45) 2(-1.25,-1.45) 3(-0.75,-1.45) 4(-0.25,-1.45) 5(0.25,-1.45) 6(0.75,-1.45) 7(1.25,-1.45) 8(1.75,-1.45)
  silkscreen extent -4.85,-2.25 4.75,3.6, body extent -4.75,-1.65 4.75,3.65, height 1.88
MOLEX_5051102091 [mm] "CONN FCC 20 poles, 0.5mm"
  rect 1.4x1 smd: 0(-7.2,2.6) 0(7.1,2.6)
  rect 0.3x1.2 smd: 1(-4.75,-0.05) 2(-4.25,-0.05) 3(-3.75,-0.05) 4(-3.25,-0.05) 5(-2.75,-0.05) 6(-2.25,-0.05) 7(-1.75,-0.05) 8(-1.25,-0.05) 9(-0.75,-0.05) 10(-0.25,-0.05) 11(0.25,-0.05) 12(0.75,-0.05) 13(1.25,-0.05) 14(1.75,-0.05) 15(2.25,-0.05) 16(2.75,-0.05) 17(3.25,-0.05) 18(3.75,-0.05) 19(4.25,-0.05) 20(4.75,-0.05)
  silkscreen extent -7.85,-0.85 7.75,5, body extent -7.75,-0.3 7.75,5, height 1.88
QFN40P600X600X90-48N [mm]
  oval 0.65x0.2 smd: 1(-3.025,2.2) 2(-3.025,1.8) 3(-3.025,1.4) 4(-3.025,1) 5(-3.025,0.6) 6(-3.025,0.2) 7(-3.025,-0.2) 8(-3.025,-0.6) 9(-3.025,-1) 10(-3.025,-1.4) 11(-3.025,-1.8) 12(-3.025,-2.2) 25(3.025,-2.2) 26(3.025,-1.8) 27(3.025,-1.4) 28(3.025,-1) 29(3.025,-0.6) 30(3.025,-0.2) 31(3.025,0.2) 32(3.025,0.6) 33(3.025,1) 34(3.025,1.4) 35(3.025,1.8) 36(3.025,2.2)
  oval 0.2x0.65 smd: 13(-2.2,-3.025) 14(-1.8,-3.025) 15(-1.4,-3.025) 16(-1,-3.025) 17(-0.6,-3.025) 18(-0.2,-3.025) 19(0.2,-3.025) 20(0.6,-3.025) 21(1,-3.025) 22(1.4,-3.025) 23(1.8,-3.025) 24(2.2,-3.025) 37(2.2,3.025) 38(1.8,3.025) 39(1.4,3.025) 40(1,3.025) 41(0.6,3.025) 42(0.2,3.025) 43(-0.2,3.025) 44(-0.6,3.025) 45(-1,3.025) 46(-1.4,3.025) 47(-1.8,3.025) 48(-2.2,3.025)
  rect 4.7x4.7 smd: 49(0,0)
  silkscreen extent -4.03,-3 3,3, body extent -3.02,-3.02 3.02,3.02, height 0.86
QFN50P900X900X100_HS_NOVIAS_65M [mm] "QFN, 64-Leads, Body 9.00x9.00mm, Pitch 0.50mm, Thermal Pad 6.30x6.30mm, IPC Low Density"
  oval 0.95x0.2 smd: 1(-4.475,3.75) 16(-4.475,-3.75) 33(4.475,-3.75) 48(4.475,3.75)
  oval 1.05x0.2 smd: 2(-4.425,3.25) 3(-4.425,2.75) 4(-4.425,2.25) 5(-4.425,1.75) 6(-4.425,1.25) 7(-4.425,0.75) 8(-4.425,0.25) 9(-4.425,-0.25) 10(-4.425,-0.75) 11(-4.425,-1.25) 12(-4.425,-1.75) 13(-4.425,-2.25) 14(-4.425,-2.75) 15(-4.425,-3.25) 34(4.425,-3.25) 35(4.425,-2.75) 36(4.425,-2.25) 37(4.425,-1.75) 38(4.425,-1.25) 39(4.425,-0.75) 40(4.425,-0.25) 41(4.425,0.25) 42(4.425,0.75) 43(4.425,1.25) 44(4.425,1.75) 45(4.425,2.25) 46(4.425,2.75) 47(4.425,3.25)
  oval 0.2x0.95 smd: 17(-3.75,-4.475) 32(3.75,-4.475) 49(3.75,4.475) 64(-3.75,4.475)
  oval 0.2x1.05 smd: 18(-3.25,-4.425) 19(-2.75,-4.425) 20(-2.25,-4.425) 21(-1.75,-4.425) 22(-1.25,-4.425) 23(-0.75,-4.425) 24(-0.25,-4.425) 25(0.25,-4.425) 26(0.75,-4.425) 27(1.25,-4.425) 28(1.75,-4.425) 29(2.25,-4.425) 30(2.75,-4.425) 31(3.25,-4.425) 50(3.25,4.425) 51(2.75,4.425) 52(2.25,4.425) 53(1.75,4.425) 54(1.25,4.425) 55(0.75,4.425) 56(0.25,4.425) 57(-0.25,4.425) 58(-0.75,4.425) 59(-1.25,4.425) 60(-1.75,4.425) 61(-2.25,4.425) 62(-2.75,4.425) 63(-3.25,4.425)
  rect 6.3x6.3 smd: 65(0,0)
  silkscreen extent -5.47,-4.7 4.7,4.7, body extent -4.6,-4.6 4.6,4.6, height 1
"S-PQFP - G64 - ADS1298" [mm] "TSQFP, 64-Leads, Body 10,00x10,00mm, Pitch 0,50mm, IPC Medium Density"
  rect 1.75x0.3 smd: 1(-5.575,3.75) 2(-5.575,3.25) 3(-5.575,2.75) 4(-5.575,2.25) 5(-5.575,1.75) 6(-5.575,1.25) 7(-5.575,0.75) 8(-5.575,0.25) 9(-5.575,-0.25) 10(-5.575,-0.75) 11(-5.575,-1.25) 12(-5.575,-1.75) 13(-5.575,-2.25) 14(-5.575,-2.75) 15(-5.575,-3.25) 16(-5.575,-3.75) 33(5.575,-3.75) 34(5.575,-3.25) 35(5.575,-2.75) 36(5.575,-2.25) 37(5.575,-1.75) 38(5.575,-1.25) 39(5.575,-0.75) 40(5.575,-0.25) 41(5.575,0.25) 42(5.575,0.75) 43(5.575,1.25) 44(5.575,1.75) 45(5.575,2.25) 46(5.575,2.75) 47(5.575,3.25) 48(5.575,3.75)
  rect 0.3x1.75 smd: 17(-3.75,-5.575) 18(-3.25,-5.575) 19(-2.75,-5.575) 20(-2.25,-5.575) 21(-1.75,-5.575) 22(-1.25,-5.575) 23(-0.75,-5.575) 24(-0.25,-5.575) 25(0.25,-5.575) 26(0.75,-5.575) 27(1.25,-5.575) 28(1.75,-5.575) 29(2.25,-5.575) 30(2.75,-5.575) 31(3.25,-5.575) 32(3.75,-5.575) 49(3.75,5.575) 50(3.25,5.575) 51(2.75,5.575) 52(2.25,5.575) 53(1.75,5.575) 54(1.25,5.575) 55(0.75,5.575) 56(0.25,5.575) 57(-0.25,5.575) 58(-0.75,5.575) 59(-1.25,5.575) 60(-1.75,5.575) 61(-2.25,5.575) 62(-2.75,5.575) 63(-3.25,5.575) 64(-3.75,5.575)
  silkscreen extent -5.7,-4.3 4.3,4.57, body extent -5,-5 5,5, height 1.2
SiT1533-C [mm] "Ultra-Low Power Quartz XTAL Replacement - XTAL Compatible Footprint"
  rect 0.75x1.4 smd: 1(-0.725,0) 3(0.725,0)
  rect 0.2x0.5 smd: 2(-0.1,-0.45) 4(0.1,0.45)
  silkscreen extent -1.4,-0.85 1.35,0.6, body extent -1,-0.6 1,0.6, height 0.55
SOT323_N [mm] "SOT323, 3-Leads, Body 2.0x1.3mm, Pitch 0.65mm, Lead Span 2.1mm, IPC Medium Density"
  rect 1.2x0.5 smd: 1(-0.95,0.65) 2(-0.95,-0.65) 3(0.95,0)
  silkscreen extent -1.07,-1.1 0.7,1.57, body extent -0.7,-1.1 0.7,1.1, height 1.1
SOT-23_A_N [mm] "SOT23, 6-Leads, Body 2.9x1.7mm, Pitch 0.95mm, Lead Span 2.8mm, IPC Medium Density"
  rect 1.1x0.65 smd: 1(-1.2,0.95) 2(-1.2,0) 3(-1.2,-0.95) 4(1.2,-0.95) 5(1.2,0) 6(1.2,0.95)
  silkscreen extent -1.32,-1.55 0.25,1.95, body extent -0.9,-1.55 0.9,1.55, height 1.45
UJ-5_N [mm] "SOT23, 5-Leads, Body 2.9x1.7mm, Pitch 0.95mm, Lead Span 2.8mm, IPC Medium Density"
  rect 1.1x0.65 smd: 1(-1.2,0.95) 2(-1.2,0) 3(-1.2,-0.95) 4(1.2,-0.95) 5(1.2,0.95)
  silkscreen extent -1.32,-1.55 0.25,1.95, body extent -0.9,-1.55 0.9,1.55, height 1
UJMPR#1 [mm] "Micro Jumper"
  rect 0.1x0.1 smd: 1(-31.3,19.55) 2(-31.3,19.3)
UJMPR#2 [mm] "Micro Jumper"
  rect 0.1x0.1 smd: 1(0,0.125) 2(0,-0.125)
VQFN20 [mm]
  rect 0.28x1.3 smd: 1(-1,-1.95) 2(-0.5,-1.95) 3(0,-1.95) 4(0.5,-1.95) 5(1,-1.95) 11(1,1.95) 12(0.5,1.95) 13(0,1.95) 14(-0.5,1.95) 15(-1,1.95)
  rect 1.3x0.28 smd: 6(1.95,-1) 7(1.95,-0.5) 8(1.95,0) 9(1.95,0.5) 10(1.95,1) 16(-1.95,1) 17(-1.95,0.5) 18(-1.95,0) 19(-1.95,-0.5) 20(-1.95,-1)
  rect 2.05x2.05 smd: 21(0,0)
  silkscreen extent -1.85,-2.42 1.85,1.85, body extent -1.75,-1.75 1.75,1.75, height 1
XTAL_3215 [mm]
  rect 1x1.8 smd: 1(-1.25,0) 2(1.25,0)
  silkscreen extent -0.6,-0.75 0.6,0.75, body extent -1.6,-0.75 1.6,0.75, height 0.81

## Part data
A1: "Bluetooth antenna"
ADC1: library part ADS1298
C1 C2 C3 C4 C5 C6 C7 C8 C9 C10 C11 C12 CA1 CA2 CA3 CA4 CA5 CA6 CA7 CA8 CA10 CC2 CC3 CC14 CC15 CC16 CC17 CC23 CC24 CC35 CC36 CC37 CC38 CC39 CC40 CC41 CC42 CP1 CP2 CW1 CW2: library part "Cap Semi", "Capacitor (Semiconductor SIM Model)"
C13: library part C0603-1µ0, "Capacitor, X7R, ±10%"
C14 C20 C25: library part C0402-100n, "Capacitor, X7R, ±10%"
C15 C16 C18 C19 C24 C26: library part C0402-12p, "Capacitor, NP0, ±2%"
C17: library part C0603-4µ7, "Capacitor, X5R, ±10%"
C21: library part C0402-100p, "Capacitor, NP0, ±5%"
C22: library part C0402-N.C., "Not mounted"
C23: library part C0402-0.8p, "Capacitor, NP0, ±5%"
CC1 CC4 CC5 CC6 CC7 CC8 CC9 CC10 CC11 CC12 CC13 CC18 CC19 CC20 CC21 CC22 CC25 CC26 CC27 CC28 CC29 CC30 CC31 CC32 CC33 CC34: "Capacitor (Semiconductor SIM Model)"
D1: library part KING-LED-RED-APT1608LSECK/J3-PRV, "1.6X0.8mm SMD CHIP LED LAMP, Hyper Red"
D2: library part KING-LED-ORANGE-APT1608LSECK/J4-PRV, "1.6X0.8mm SMD CHIP LED LAMP, Super Bright Orange"
J2: library part 629105136821, "Connector"
L1: library part L0402-15n, "High frequency chip inductor ±10%"
L2: library part L0603-10µ, "Chip inductor, IDC,min = 50 mA, ±20%"
L3: library part L0402-3n9, "High frequency chip inductor ±5%"
L4 L5: library part Inductor, "Inductor"
LW1: library part BOUR-IND-SRN4026-220M, "Semi-shielded Power Inductor, 22uH, 3A"
P1 P2: library part ADP122, "Regulator"
PW1: "IC ENERGY HARV CTRLR BATT 20VQFN"
Q1: "PNP Switching Transistor"
R1 R2 R3 R4 R5 R6 R7 R8 R9 R10 R11 R12 R13 R14 R15 R16 R17 R18 R19 R20 RJ1 RJ2 RVAVDD1 RVAVDD2 RVBAT1 RVDVDD1 RVREG1 RVSP1 Value1 XX1: library part Res3, "Resistor"
R21 R22 R23 R24 R25: "Resistor"
U1: library part PULP_MR_WOLF, "Mr. Wolf PULP Heterogeneous Multi-Core System-On-Chip"
U2: library part nRF52832-QFAB, "Multi-protocol Bluetooth Low Energy, ANT and 2.4GHz proprietary system-on-chip"
U3: library part LT1790
U4: "Integrated Environmental Unit"
U6: "Mic Omni-Directional -26dB 3.6Vdc Rectangular Solder Pad"
X1: library part XTAL_SMD2016_32MHz_8pF_General, "XTAL SMD 2016, 32MHz, Cl=8pF, Total Tol: ±40ppm"
X2: library part XTAL_SMD3215_32.768kHz_9pF_General, "XTAL SMD 3215, 32.768kHz, Cl=9pF, Total Tol: ±50ppm"
XX2 XX3: library part L0402-N.C., "Not mounted"
YW1: library part SIT-OSC32KHZ-SIT1533AC-H5-DCC-32.768, "20 ppm, Ultra-Low Power 32.768 kHz Quartz XTAL Replacement"

## Free pads (board coordinates)
  rect 39.37x31.5 smd: 2(830.71,86.2) 3(830.71,38.58)

## Via types
v1: diameter 24.41, hole 11.81, Top Layer to Bottom Layer, 92 vias
v2: diameter 14, hole 6, Top Layer to Bottom Layer, 55 vias
v3: diameter 16, hole 8, Top Layer to Bottom Layer, 36 vias
v4: diameter 25.98, hole 12.99, Top Layer to Bottom Layer, 16 vias
v5: diameter 24.41, hole 11.81, Top Layer to Bottom Layer, tented both sides, 13 vias
v6: diameter 16, hole 8, Top Layer to Bottom Layer, tented both sides, 13 vias
v7: diameter 16, hole 8, Top Layer to Bottom Layer, tented bottom, 2 vias

## Nets (pads, with @x,y where several pads share a name; then routed paths per layer and width w, separated by ;. In a path a pad name is that pad's centre, name@x,y a point inside that pad or via, vN(x,y) a via of type N, cw(c..) or ccw(c..) an arc to the next point about the centre after c; other vN are vias at no path point)
8_16_EL1: ADC2.16 PEL2.20 | length 181.3
  Top Layer w7.87: ADC2.16@1432.09,-198.82 1503.67,-198.82 v1(1503.94,-198.55) v1@1505.64,-196.85
  Bottom Layer w7.87: PEL2.20@1401.57,-198.82 1503.67,-198.82 v1(1503.94,-198.55) v1@1503.94,-196.85 ; v1@1503.94,-200.79 v1@1505.91,-198.82
8_16_EL2: ADC2.14 PEL2.18 | length 173.9
  Top Layer w7.87: ADC2.14@1432.09,-238.19 v1(1503.94,-238.19)
  Bottom Layer w7.87: PEL2.18@1401.57,-238.19 v1@1503.67,-238.19
8_16_EL3: ADC2.12 PEL2.16 | length 173.9
  Top Layer w7.87: ADC2.12@1432.09,-277.56 v1@1503.67,-277.56
  Bottom Layer w7.87: PEL2.16@1401.57,-277.56 v1(1503.94,-277.56)
8_16_EL4: ADC2.10 PEL2.14 | length 176.4
  Top Layer w7.87: ADC2.10@1432.09,-316.93 1505.05,-316.93 v1@1505.64,-316.34
  Bottom Layer w7.87: PEL2.14@1401.57,-316.93 1503.35,-316.93 v1(1503.94,-316.34)
8_16_EL5: ADC2.8 PEL2.12 | length 175.3
  Top Layer w7.87: ADC2.8@1432.09,-356.3 v1@1503.08,-356.3
  Bottom Layer w7.87: PEL2.12@1401.57,-356.3 v1(1503.94,-356.3) v1@1505.91,-356.3
8_16_EL6: ADC2.6 PEL2.10 | length 169.3
  Top Layer w7.87: ADC2.6@1437.01,-395.67 v1(1503.94,-395.67)
  Bottom Layer w7.87: PEL2.10@1401.57,-395.67 v1(1503.94,-395.67)
8_16_EL7: ADC2.4 PEL2.8 | length 169.3
  Top Layer w7.87: ADC2.4@1437.01,-435.04 v1(1503.94,-435.04)
  Bottom Layer w7.87: PEL2.8@1401.57,-435.04 v1(1503.94,-435.04)
8_16_EL8: ADC2.2 PEL2.6 | length 169.2
  Top Layer w7.87: ADC2.2@1437.01,-474.41 v1(1503.67,-474.41)
  Bottom Layer w7.87: PEL2.6@1401.57,-474.41 1501.38,-474.41 v1@1503.35,-476.38
8_16_ELM1: ADC2.15 PEL2.19 | length 141.1
  Top Layer w7.87: v1@1346.46,-218.5 ADC2.15@1432.09,-218.5
  Bottom Layer w7.87: v1(1346.41,-219.16) 1347.06,-218.5 PEL2.19@1401.57,-218.5
8_16_ELM2: ADC2.13 PEL2.17 | length 139.3
  Top Layer w7.87: v1@1347.2,-255.91 1349.17,-257.87 ADC2.13@1432.09,-257.87
  Bottom Layer w7.87: v1@1347.96,-257.87 PEL2.17@1401.57,-257.87
  other v1: 1347.06,-257.87
8_16_ELM3: ADC2.11 PEL2.15 | length 140.1
  Top Layer w7.87: v1@1346.41,-297.24 v1(1347.2,-297.24) ADC2.11@1432.09,-297.24
  Bottom Layer w7.87: v1(1347.2,-297.24) PEL2.15@1401.57,-297.24
8_16_ELM4: ADC2.9 PEL2.13 | length 140.7
  Top Layer w7.87: v1(1346.46,-336.61) ADC2.9@1432.09,-336.61
  Bottom Layer w7.87: v1(1346.46,-336.61) PEL2.13@1401.57,-336.61
8_16_ELM5: ADC2.7 PEL2.11 | length 140.8
  Top Layer w7.87: v1(1346.46,-375.98) v1(1346.46,-375.98) ADC2.7@1432.09,-375.98
  Bottom Layer w7.87: v1(1346.46,-375.98) PEL2.11@1401.57,-375.98
8_16_ELM6: ADC2.5 PEL2.9 | length 140.8
  Top Layer w7.87: v1(1346.46,-415.35) ADC2.5@1432.09,-415.35
  Bottom Layer w7.87: v1(1346.46,-415.35) PEL2.9@1401.57,-415.35
8_16_ELM7: ADC2.3 PEL2.7 | length 140.1
  Top Layer w7.87: v1(1346.46,-454.72) v1(1346.46,-454.72) ADC2.3@1432.09,-454.72
  Bottom Layer w7.87: v1@1347.2,-454.72 PEL2.7@1401.57,-454.72
8_16_ELM8: ADC2.1 PEL2.5 | length 143.9
  Top Layer w7.87: v1@1347.2,-494.09 ADC2.1@1432.09,-494.09
  Bottom Layer w7.87: v1(1346.46,-494.09) 1401.57,-494.09 PEL2.5@1405.51,-494.09
8_16_VCAP1: ADC2.28 CC31.2 | length 87.2
  Top Layer w8: CC31.2@1122.05,-40.63 1124.02,-42.6 ADC2.28@1124.02,-126.97
8_16_VCAP2: ADC2.30 CC22.2 | length 116
  Top Layer w8: CC22.2@1046.8,-27.87 1048.81,-27.87 1084.65,-63.7 ADC2.30@1084.65,-126.97
8_16_VCAP3: ADC2.55 CC32.2 CC33.2 | length 124.8
  Top Layer w8: ADC2.55@1163.39,-565.94 1163.39,-620.08 1177.17,-633.86 CC32.2@1177.17,-653.54 ; CC32.2@1177.17,-657.48 CC33.2@1208.66,-657.48
8_16_VCAP4: ADC2.26 CC28.2 | length 91.4
  Top Layer w8: ADC2.26@1163.7,-118.11 1163.39,-117.8 1163.39,-29.35 CC28.2@1165.17,-27.56
8_16_VREFP: ADC2.24 CC29.2 CC30.2 | length 167.1
  Top Layer w8.66: ADC2.24@1202.76,-126.97 1202.76,-31.18 1209.33,-24.61 1258.86,-24.61 CC30.2@1267.72,-15.75
8_16_WCT: ADC2.64 CC34.2 | length 72.7
  Top Layer w8.66: ADC2.64@1340.55,-565.94 1340.55,-635.83 CC34.2@1342.52,-637.8
ADC_A_REF1.5V: CC17.2 PEL1.3 PEL2.3 R8.2 R9.2 | length 1153.9
  Signal Layer 1 w19.68: v1(1381.89,168.63) 1349.73,168.63 1272.05,90.94 1272.05,-500.39 1303.15,-531.5 v1(1452.76,-531.5)
  Bottom Layer w7.87: R8.2@1338.58,230.89 CC17.2@1338.58,196.84 R9.2@1338.58,162.13 1345.95,169.5 v1@1381.38,169.5 ; R8.2@1339.27,228.35 1350.05,239.13 PEL1.3@1397.64,239.13 ; PEL2.3@1401.57,-533.46 v1@1451.12,-533.46
AGND: ADC1.20 ADC1.23 ADC1.25 ADC1.31 ADC1.32 ADC1.53 ADC1.57 ADC1.58 ADC2.20 ADC2.23 ADC2.25 ADC2.31 ADC2.32 ADC2.53 ADC2.57 ADC2.58 CC1.1 CC4.1 CC5.1 CC6.1 CC7.1 CC8.1 CC9.1 CC10.1 CC11.1 CC12.1 CC13.1 CC14.1 CC15.1 CC16.1 CC17.1 CC18.1 CC19.1 CC20.1 CC21.1 CC22.1 CC25.1 CC26.1 CC27.1 CC28.1 CC29.1 CC30.1 CC31.1 CC32.1 CC33.1 CC34.1 CP1.1 CP2.1 P1.2 P2.2 PEL1.1 PEL2.1 R9.1 RJ1.2 U3.1 U3.2 | length 3323
  Top Layer w7.87: v1(998.26,11.81) 998.5,11.57 CC22.1@1046.02,11.57 ; ADC1.32@1046.61,633.86 1046.61,602.36 1065.67,583.31 1184.41,583.31 ; ADC1.32@1046.61,646.61 1046.61,713.23 ; 1046.8,715.63 1061.65,700.79 1066.3,700.79 ADC1.31@1066.3,646.61 ; v1@1079.13,15.75 v1(1080.03,16.65) 1084.08,20.69 CC31.1@1121.86,20.69 ; CC14.1@1125.35,75.83 1163.39,75.83 CC11.1@1163.7,75.51 ; CC14.1@1125.35,78.74 1121.86,78.74 1105.67,94.93 1105.67,131.08 1125.35,150.77 ADC1.53@1125.35,205.67 1125.98,206.3 1125.98,271.65 1143.7,289.37 1201.91,289.37 1212.6,278.68 1212.6,260.91 ; ADC1.25@1184.41,646.61 1184.41,583.31 ; v1(1196.85,23.62) CC29.1@1228.35,23.62 CC30.1@1271.65,23.62 ; CC12.1@1204.09,75.83 CC12.1@1205.53,75.83 ; ADC1.57@1204.09,205.67 1204.09,260.91 1212.6,260.91 ; CC9.1@1204.09,775.59 CC8.1@1243.46,775.59 CC5.1@1283.46,775.59 CC6.1@1322.2,775.59 ; CC12.1@1206.55,74.8 CC12.1@1205.53,75.83 ; ADC1.58@1221.77,205.67 ADC1.58@1224.41,203.03 ; ADC1.23@1223.78,635.82 1223.78,583.31 1184.41,583.31 ; ADC1.58@1223.78,227.09 1223.78,260.91 1212.6,260.91 ; 1223.78,586.61 1223.78,583.31 1248.03,583.31 ; 1246.89,582.16 1248.03,583.31 ; CC15.1@1279.53,74.8 1310.08,74.8 1317.95,66.93 CC13.1@1341.89,66.93 1389.37,66.93 v1(1401.57,54.72) ; ADC1.20@1282.83,635.83 1283.46,635.2 1283.46,583.31 1248.03,583.31 ; CC15.1@1283.46,75.83 CC15.1@1282.83,75.83 CC4.1@1240.16,75.83 CC12.1@1205.53,75.83 ; CC26.1@1310,23.62 CC26.1@1310.08,23.54 ; CC26.1@1310.08,23.62 1317.95,15.75 CC25.1@1364.83,15.75 ; CC6.1@1322.83,775.59 1375.7,775.59 1385.45,785.35 v5(1425.2,785.35) ; CC25.1@1364.83,11.81 1420.28,11.81 v1@1432.09,0.01
  Top Layer w8.66: 952.52,751.97 1004.59,751.97 ; ADC2.32@1045.28,-126.97 1062.01,-126.97 ADC2.31@1062.99,-125.98 ; v2@1064.96,-196.06 ADC2.31@1064.96,-126.97 ; v2(1070.87,-696.85) CC33.1@1212.6,-696.85 v2(1238.19,-696.85) CC19.1@1267.72,-696.85 ; CC1.1@1080.98,775.59 1090.83,785.43 CC10.1@1125.98,785.43 1159.03,785.43 CC7.1@1169.29,775.17 ; CC11.1@1164.72,75.83 CC12.1@1204.09,75.83 ; CC7.1@1169.29,775.59 1203.69,775.59 CC9.1@1204.09,775.99 ; v2(1223.78,-618.11) ADC2.58@1223.78,-565.94 ; CC34.1@1340.55,-692.91 1366.14,-692.91 1393.7,-665.35 v2(1393.7,-635.83)
  Bottom Layer w7.87: CP2.1@988.19,-173.23 1039.07,-173.23 v2@1062.99,-197.15 ; v1(998.26,11.81) 1014.57,28.12 CP1.1@1014.57,55.12
  Bottom Layer w8.66: 1158.7,326.77 1159.79,327.86 1161.42,329.49 U3.1@1161.42,368.11 U3.2@1161.42,405.51 ; v2@1224.41,-618.11 1238.19,-604.33 CC21.1@1238.19,-547.24 ; CC16.1@1285.34,275.51 CC16.1@1291.34,275.51 ; R9.1@1299.21,162.13 1299.21,148.24 1312.57,134.88 1390.47,134.88 1404.33,148.74 1404.33,193.07 PEL1.1@1397.64,199.76 ; R9.1@1299.21,162.96 CC17.1@1299.21,196.84 ; v2(1393.7,-635.83) PEL2.1@1393.7,-572.83
  Bottom Layer w9.06: P1.2@1000,151.24 1002.3,153.54 1028.3,153.54 1043.97,169.21 1043.97,254.89 1088.77,299.69 1088.77,299.91 1116.72,327.86 1159.79,327.86
  other v1: 1433.07,-0.37 1493.7,0.01 1555.18,0.01 1406.68,670.22
  other v2: 1064.96,-196.85
  other v5: 1485.83,785.72 1547.31,785.72
AVDD_A: ADC1.19 ADC1.21 ADC1.22 ADC1.54 ADC1.56 ADC1.59 CC4.2 CC5.2 CC6.2 CC14.2 CC15.2 PEL1.2 RVAVDD1.2 U3.4 | length 2657
  Top Layer w15.75: CC14.2@1125.98,118.11 1145.04,137.17 ADC1.54@1145.04,205.67 ; ADC1.54@1145.04,206.3 1145.04,263.78 1184.41,263.78 ADC1.56@1184.41,205.67 1184.41,145.67 1243.46,145.67 ; ADC1.22@1243.46,646.61 1243.46,701.73 1302.1,701.73 ; CC4.2@1244.09,115.2 1243.46,115.83 1243.46,145.67 ; ADC1.21@1262.52,647.72 1262.52,701.42 ; v1(1299.21,350.39) 1299.21,272.48 ; ADC1.19@1302.52,646.73 1302.52,700.79 ; 1421.26,196.85 1421.26,200.79 1349.57,272.48 1299.21,272.48 ; 1243.46,145.67 ADC1.59@1243.46,205.67 1243.46,272.48 1299.21,272.48
  Top Layer w19.68: CC4.2@1240.16,115.2 CC4.2@1240.47,115.2 ; CC4.2@1240.16,115.51 CC4.2@1240.47,115.2 ; CC15.2@1282.83,115.83 1282.2,115.2 1244.09,115.2 CC4.2@1240.47,115.2 ; 1283.46,709.92 CC5.2@1283.46,736.22 CC6.2@1322.83,736.22 1551.81,736.22 1551.81,712.03 1551.81,112.99 v1@1422.44,112.99 ; v1(1421.26,114.37) 1421.26,196.85
  Bottom Layer w15.75: RVAVDD1.2@1153.54,180.43 1271.1,180.43 1273.74,177.8 1273.62,177.68 1273.62,146.58 1281.69,138.51 1282.65,138.51 1306.79,114.37 v1(1421.26,114.37) ; U3.4@1255.91,444.06 1257.05,442.91 1295.28,442.91 v1@1295.28,350.28
AVDD_B: ADC2.19 ADC2.21 ADC2.22 ADC2.54 ADC2.56 ADC2.59 CC18.2 CC19.2 CC20.2 CC21.2 CC25.2 CC26.2 CC27.2 PEL2.2 RVAVDD2.2 | length 1390.5
  Top Layer w8: CC20.2@1106.3,-657.48 CC18.2@1141.73,-657.48 1141.73,-623.39 v2@1143.7,-621.42 ; v2(1143.7,-622.05) v2@1143.7,-621.42 ; ADC2.54@1143.7,-574.8 v2@1143.7,-621.42 ; ADC2.54@1143.7,-565.94 1143.7,-515.75 1182.44,-515.75 ADC2.56@1182.44,-555.12 ; ADC2.56@1182.44,-571.39 ADC2.56@1183.07,-570.76 ; v2@1238.19,-474.41 1242.13,-478.35 ADC2.59@1242.13,-565.94 1242.13,-607.64 1267.72,-633.23 CC19.2@1267.72,-655.76 v2(1295.28,-655.76) ; ADC2.22@1242.13,-126.97 1259.13,-126.97 ADC2.21@1260.24,-125.86 ; ADC2.21@1261.81,-126.97 1262.52,-126.97 1262.52,-59.06 v1@1303.15,-59.06 ; ADC2.19@1301.18,-126.97 v1@1301.18,-61.02 ; v1(1310.08,-55.12) 1310.08,-27.87 1310.72,-27.87 ; CC26.2@1311.02,-27.56 1310.72,-27.87 ; CC25.2@1364.83,-26.57 1361.88,-23.62 1314.96,-23.62 1310.72,-27.87
  Bottom Layer w7.87: CC21.2@1238.19,-507.87 1279.53,-507.87 1324.8,-553.15 PEL2.2@1397.64,-553.15 PEL2.2@1401.57,-553.15
  Bottom Layer w8: v2(1143.7,-622.05) 1180,-622.05 1181.1,-623.15
  Bottom Layer w10: 1185.04,-299.21 CC27.2@1236.15,-299.21 ; 1191.08,-505.91 CC21.2@1236.22,-505.91 ; v2@1236.38,-476.38 1238.19,-478.18 CC21.2@1238.19,-507.87
  Bottom Layer w15.75: v1(1310.08,-55.12) 1313,-55.12 v1@1314.97,-57.09
  Bottom Layer w19.68: RVAVDD2.2@1027.7,-57.09 v1@1314.97,-57.09
  other v2: 1238.19,-476.38
AVDD_OUT_A: CP1.2 P1.5 RVAVDD1.1 | length 156.9
  Bottom Layer w7.87: P1.5@1086.61,114.37 1087.15,113.84 P1.5@1094.49,113.84 P1.5@1114.51,113.84
  Bottom Layer w11.81: CP1.2@1053.94,55.51 1053.92,110.1 1057.99,114.17 P1.5@1084.25,114.17 ; P1.5@1114.51,113.84 1122.05,121.38 RVAVDD1.1@1153.54,121.38
AVDD_OUT_B: CP2.2 P2.5 RVAVDD2.1 | length 130.5
  Bottom Layer w7.87: CP2.2@940.94,-169.29 CP2.2@942.35,-167.89 ; P2.5@942.35,-126.55 P2.5@958.66,-110.24
  Bottom Layer w11.81: CP2.2@942.35,-167.89 P2.5@942.35,-126.55
  Bottom Layer w15.75: P2.5@960.31,-116.14 P2.5@962.28,-114.17
  Bottom Layer w19.68: P2.5@962.28,-114.17 RVAVDD2.1@1023.62,-114.17
BME_DVDD: CA4.2 CA5.2 R21.2 U4.2 U4.6 U4.8 | length 209.3
  Top Layer w7.87: v2@598.43,-299.21 U4.2@632.87,-299.21 ; CA5.2@727.36,-389.04 v2(727.36,-358.66) U4.8@727.36,-330.71 ; U4.6@728.35,-270.14 730.77,-267.72 CA4.2@776.06,-267.72 ; R21.2@774.62,-334.47 v2(774.62,-303.15) 774.62,-270.14 CA4.2@777.05,-267.72
  other v2: 594.49,-299.21
CS_NRF#: U1.36 U2.16 | length 574.8
  Top Layer w7.87: U1.36@773.94,222.72 779.81,228.59 790.17,228.59 792.78,225.98 817.65,225.98 823.16,220.47 835.2,220.47 839.96,215.7 890.58,215.7 907.11,199.18 v1@907.11,183.35 ; v1@901.58,187.4 v1(903.93,185.04)
  Bottom Layer w7.87: U2.16@644.69,247.05 644.69,201.71 701.83,144.57 714.95,144.57 765.42,94.09 850,94.09 876.54,120.63 876.54,140.59 878.34,142.4 878.34,146.47 897.62,165.75 897.91,165.75 905.42,173.26 v1@905.42,183.55
DEC1: C14.1 U2.1 | length 158.8
  Bottom Layer w7.87: U2.1@724.41,452.76 724.41,494.72 757.52,527.83 771.65,527.83 771.65,554.13 776.57,559.06 C14.1@799.21,559.06
DEC2: C22.2 U2.32 | length 78.9
  Bottom Layer w7.87: C22.2@410.5,397.49 418.22,389.76 U2.32@486.22,389.76
DEC3: C21.1 U2.33 | length 82.4
  Bottom Layer w7.87: C21.1@416.9,437.01 418.98,437.01 450.47,405.51 U2.33@486.22,405.51
DEC4: C13.2 L1.1 U2.46 | length 108.8
  Bottom Layer w7.87: 624.57,556.65 L1.1@657.69,556.65 ; L1.1@657.48,558.07 662.35,553.2 662.35,487.16 U2.46@660.43,485.24
DGND: A2.3 A2.5 A2.6 A2.7 A2.8 ADC1.33 ADC1.41 ADC1.49 ADC1.51 ADC2.33 ADC2.41 ADC2.49 ADC2.51 C1.1 C2.1 C3.1 C4.1 C5.1 C6.1 C7.1 C8.1 C9.1 C10.1 C11.1 C12.1 C13.1 C14.2 C15.2 C16.2 C17.2 C18.2 C19.2 C20.2 C21.2 C22.1 C23.1 C24.1 C25.2 C26.1 CA1.1 CA2.1 CA3.1 CA4.1 CA5.1 CA6.1 CA7.1 CA8.1 CA10.1 CC2.1 CC3.1 CC23.1 CC24.1 CC35.1 CC36.1 CC37.1 CC38.1 CC39.1 CC40.1 CC41.1 CC42.1 CONN_BAT1.2 CW1.1 CW2.1 D1.2 D2.2 J2.5 JM8.1 PJ1.2 PW1.1 PW1.5 PW1.9 PW1.15 PW1.17 PW1.21 PW2.0 PW2.3 R4.2 R15.2 R16.2 R17.2 R20.2 RJ1.1 SW1.1 SW1.6 U1.49 U1.65 U2.31 U2.45 U2.49 U4.1 U4.7 U5.2 U5.3 U5.6 U5.7 U5.8 U6.GND U6.GND1 U6.GND2 U6.GND3 U6.LR X1.2 X1.4 XX2.2 XX3.2 YW1.2 | length 6093.7
  Top Layer w7.87: PW1.15@167.32,629.92 200.79,629.92 PW1.21@212.6,641.73 ; CC37.1@170.08,498.03 196.58,498.03 CC36.1@200.79,493.82 ; PW1.17@224.41,592.52 PW1.21@224.41,637.8 ; PW1.9@224.41,746.06 224.41,692.91 PW1.21@228.35,688.98 ; D1.2@255.91,-83.66 255.91,-110.24 v2(259.84,-114.17) ; PW1.21@279.53,641.73 291.34,629.92 PW1.1@320.87,629.92 ; PW1.21@279.53,700.79 287.4,708.66 PW1.5@320.87,708.66 314.96,714.57 314.96,795.28 329.92,795.28 CC40.1@330.71,796.06 ; D2.2@307.09,-83.66 307.09,-85.37 v2(343.76,-122.05) ; v2(314.96,322.48) 320.15,327.67 C4.1@320.15,360.51 ; CC38.1@362.2,562.99 380.72,581.5 ; YW1.2@403.54,581.5 380.72,581.5 ; CC39.1@409.44,635.82 381.89,635.82 381.89,582.68 380.72,581.5 ; CC39.1@421.26,640.37 426.88,640.37 436.53,630.72 452.9,630.72 467.93,615.68 C2.1@467.93,606.3 ; C8.1@467.12,537.4 C8.1@472.87,537.4 ; v2(582.68,15.75) 582.68,11.57 582.84,11.41 C7.1@608.54,11.41 ; CW2.1@606.3,605.35 641.16,605.35 CW1.1@641.84,606.03 ; U1.65@681.1,393.7 747.36,459.96 U1.49@747.36,487.48 ; C10.1@755.91,35.83 755.91,36.2 C26.1@790.57,70.87 ; C26.1@791.11,75.2 791.11,115.75 C24.1@793.47,118.11 ; C6.1@870.08,281.77 877.98,273.87 901.12,273.87 901.76,273.23 919.49,273.23 930.51,262.2 938.26,262.2 972.12,228.34 973.78,228.34 ; v2(889.76,-574.8) CC23.1@889.76,-531.5 ; C9.1@896.09,235.39 928.45,203.03 952.52,203.03 973.78,224.29 973.78,228.34 ; v6@903.83,580.92 910.97,573.78 ADC1.33@973.78,573.78 ; v2(925.2,-198.82) ADC2.33@973.43,-198.82 ; v2(956.69,-649.54) 999.69,-649.54 CC24.1@1000,-649.85 ; v5(960.63,74.93) 1003.81,74.93 1003.94,74.8 1025.04,95.91 CC3.1@1046.02,74.93 ; ADC2.41@973.43,-356.3 975.79,-358.66 1079.13,-358.66 v2(1129.92,-409.45) ; 973.78,228.59 973.78,228.34 ; v2(1016.14,-567.24) 1017.44,-565.94 ADC2.49@1045.28,-565.94 ; ADC1.49@1044.9,228.34 973.78,228.34 ; CC3.1@1046.61,75.83 CC2.1@1085.04,75.83 ; ADC1.49@1046.61,205.67 1046.61,150.58 ; 1046.8,150.77 1046.61,150.58 ; CC3.1@1047.24,74.8 1023.62,98.43 1023.62,127.78 1032.69,136.85 1032.88,136.85 1046.61,150.58 ; ADC1.49@1047.24,222.72 1047.24,258.9 1085.98,258.9 ADC1.51@1085.98,205.67
  Top Layer w8: C5.1@320.15,242.4 320.15,221.54 v2(342.52,199.18) ; v2(406.06,673.23) 412.4,666.89 CC39.1@412.4,644.55 ; CA10.1@665.35,-661.42 v2(704.72,-661.42)
  Top Layer w10: v2(632.68,-484.25) 662.07,-513.64 U6.GND3@662.07,-526.57 ; v2(632.87,-370.08) U4.1@632.87,-330.71 ; v2(688.98,-444.88) CA5.1@688.98,-389.04 688.98,-316.59 706.36,-299.21 U4.7@727.36,-299.21 ; CA7.1@699.09,-106.3 CA8.1@699.09,-149.61 737.95,-149.61 v2(769.45,-118.11) ; v2(704.72,-10.82) 704.72,-7.87 685.16,11.69 C11.1@685.16,19.69 687.28,19.69 699.09,31.5 C10.1@755.91,31.5 ; v2(729.98,-598.43) U6.GND1@729.98,-574.8 ; U6.GND1@756.55,-574.8 U6.LR@756.55,-544.29 ; v2(760.43,-198.82) 760.43,-204.39 776.06,-220.02 CA4.1@776.06,-228.35 CA4.1@781.17,-228.35 ; U6.GND2@797.89,-526.57 v2(829.69,-526.57)
  Top Layer w15.75: v1(467.12,-440.94) 468.9,-442.72 J2.5@468.9,-518.7 ; v3@576.05,800.46 v3@578.74,803.15 ; U6.GND@729.98,-478.35 v2(729.98,-442.72) ; C12.1@736.22,614.43 736.22,633.33 v3@749.03,646.14
  Top Layer w19.68: CONN_BAT1.2@543.7,789.37 568.9,789.37 v3(578.74,799.21)
  Signal Layer 1 w7.87: v4(531.49,429.13) 531.49,392.72 v4(534.45,389.76) ; v4(534.45,295.28) v4@534.45,339.72 ; v4(534.45,342.52) 578.62,342.52 v4@581.12,340.02 ; v4@534.69,389.76 v4(581.69,389.76) ; v4@581.69,390.57 v4@581.69,436.44 ; v4@583.58,295.28 581.69,297.17 v4(581.69,342.52) v4(628.94,342.52) ; v4@586.46,389.76 v4@628.46,389.76 ; v4@628.94,296.24 v4(628.94,342.52) ; v4@628.94,390.57 v4@628.94,436.53 ; v4@631.6,389.76 v4@676.08,389.76 ; v4@676.18,296.26 v4(676.18,342.52) v4(628.94,342.52) ; v4(676.18,389.76) v4(676.18,437.01)
  Bottom Layer w7.87: R15.2@71.18,712.6 R15.2@74.6,712.6 ; R15.2@81.1,721.73 78.74,719.37 78.74,705.04 101.1,682.68 101.6,682.68 106.3,677.98 106.3,623.98 ; 107.08,623.98 127.86,623.98 ; 126.37,563.72 126.37,622.49 127.86,623.98 ; 127.95,624.07 127.86,623.98 ; 139.93,623.98 127.86,623.98 ; 139.96,624.02 250.16,624.02 290.57,664.42 ; v1@218.11,-405.51 220.47,-403.15 SW1.6@220.47,-374.02 ; SW1.1@220.47,-271.65 v1(220.47,-250.39) ; XX3.2@250.63,290 XX2.2@287.4,290 ; XX2.2@287.69,280.51 v2(311.02,280.51) ; XX2.2@288.39,285.47 XX2.2@290.31,287.4 ; R17.2@291.34,732.28 R16.2@291.34,695.63 291.34,665.89 292.81,664.42 292.46,664.08 328.29,664.08 CC42.1@329.29,663.07 ; v2@315.94,322.48 378.62,322.48 386.14,314.96 C23.1@399.61,314.96 ; X1.2@359.84,547.38 351.83,539.37 C18.2@322.83,539.37 322.83,531.5 318.76,531.5 303.15,515.89 303.15,484.11 308.92,478.35 321.45,478.35 370.08,429.72 C22.1@370.08,397.64 C22.1@370.08,393.7 ; C15.2@370.63,586.61 369.63,585.61 369.63,546.87 385.12,546.87 385.12,520.39 387.19,518.32 407.92,518.32 411.69,514.55 X1.4@411.69,498.03 ; C22.1@371.91,397.64 393.33,376.22 ; 393.7,375 394.69,374.02 U2.31@486.22,374.02 ; PW2.0@515.75,740.16 PW2.3@566.93,740.16 600.05,740.16 602.22,742.33 638.26,742.33 CC41.1@657.69,722.9 ; 618.11,600.11 621.84,600.11 ; 624.57,600.11 621.84,600.11 ; U2.49@644.69,441.93 U2.49@649.61,437.01 ; CC41.1@657.48,726.4 CC41.1@657.69,726.61 ; U2.49@677.49,296.59 715.35,258.73 ; 715.62,259.4 715.62,249.6 C25.2@771.65,193.57 ; C17.2@744.48,605.59 744.48,632.17 654.36,632.17 640.31,618.11 639.84,618.11 621.84,600.11 ; C17.2@744.69,605.59 744.69,643.61 v3@748.46,647.38 ; C14.2@799.21,598.43 829.4,598.43 C16.2@830.71,599.73 ; 818.18,598.7 CA2.1@818.18,632.14 ; CA1.1@819.53,756.67 827.39,764.52 827.39,771.65 ; v1(827.39,797.44) 827.39,771.65 ; C16.2@830.71,598.7 859.64,598.7 C19.2@859.92,598.43 ; CA3.1@858.27,771.65 827.39,771.65 ; A2.8@860.63,649.03 A2.7@860.63,630.2 A2.7@861.43,630.2 ; C19.2@861.43,598.7 C19.2@861.43,601.14 ; A2.6@881.89,627.95 879.64,630.2 A2.7@861.43,630.2 ; v6@901.97,583.03 901.97,601.14 ; A2.3@923.62,649.61 923.05,649.03 901.97,649.03 A2.5@901.97,628.23 901.97,601.14 ; R4.2@964.57,51.18 v5@964.57,70.04 ; v2(1129.92,-409.45) 1131.89,-411.42 1131.89,-433.07 ; C19.2@861.43,601.14 901.97,601.14 ; C19.2@861.43,601.14 A2.7@861.43,630.2
  Bottom Layer w10: v2(566.81,-74.8) 645.67,-74.8 649.88,-70.59 U5.8@649.88,-48.23 ; U5.6@642.99,-94.49 U5.7@642.99,-76.03 ; v2(660.43,-188.98) 669.57,-179.84 U5.3@669.57,-140.75 U5.2@687.99,-140.75
  Bottom Layer w11.81: U2.31@486.22,374.02 U2.49@523.62,374.02 ; U2.49@644.69,441.93 U2.45@644.69,485.24
  other v1: 220.47,-401.57 268.69,647.38
  other v3: 751.97,649.61
  other v4: 581.69,295.28 628.94,295.28 676.18,295.28 628.94,389.76 582.68,429.13 628.94,437.01
  other v6: 903.93,580.15 1011.81,674.08